# Altium PCB Shield.PcbDoc (part 1 of 3)
Units mm, origin at the board's own origin, x right, y up, seen from the top; angles counter-clockwise.
Board outline 69.82 x 93.25 mm, 4 copper layers (Top Layer, Int1 (GND), Int2 (PWR), Bottom Layer), stack 1.586 mm thick; 51 components, 80 nets, 458 pads, 669 vias.
Unrouted connection lines stored in the file: 105.
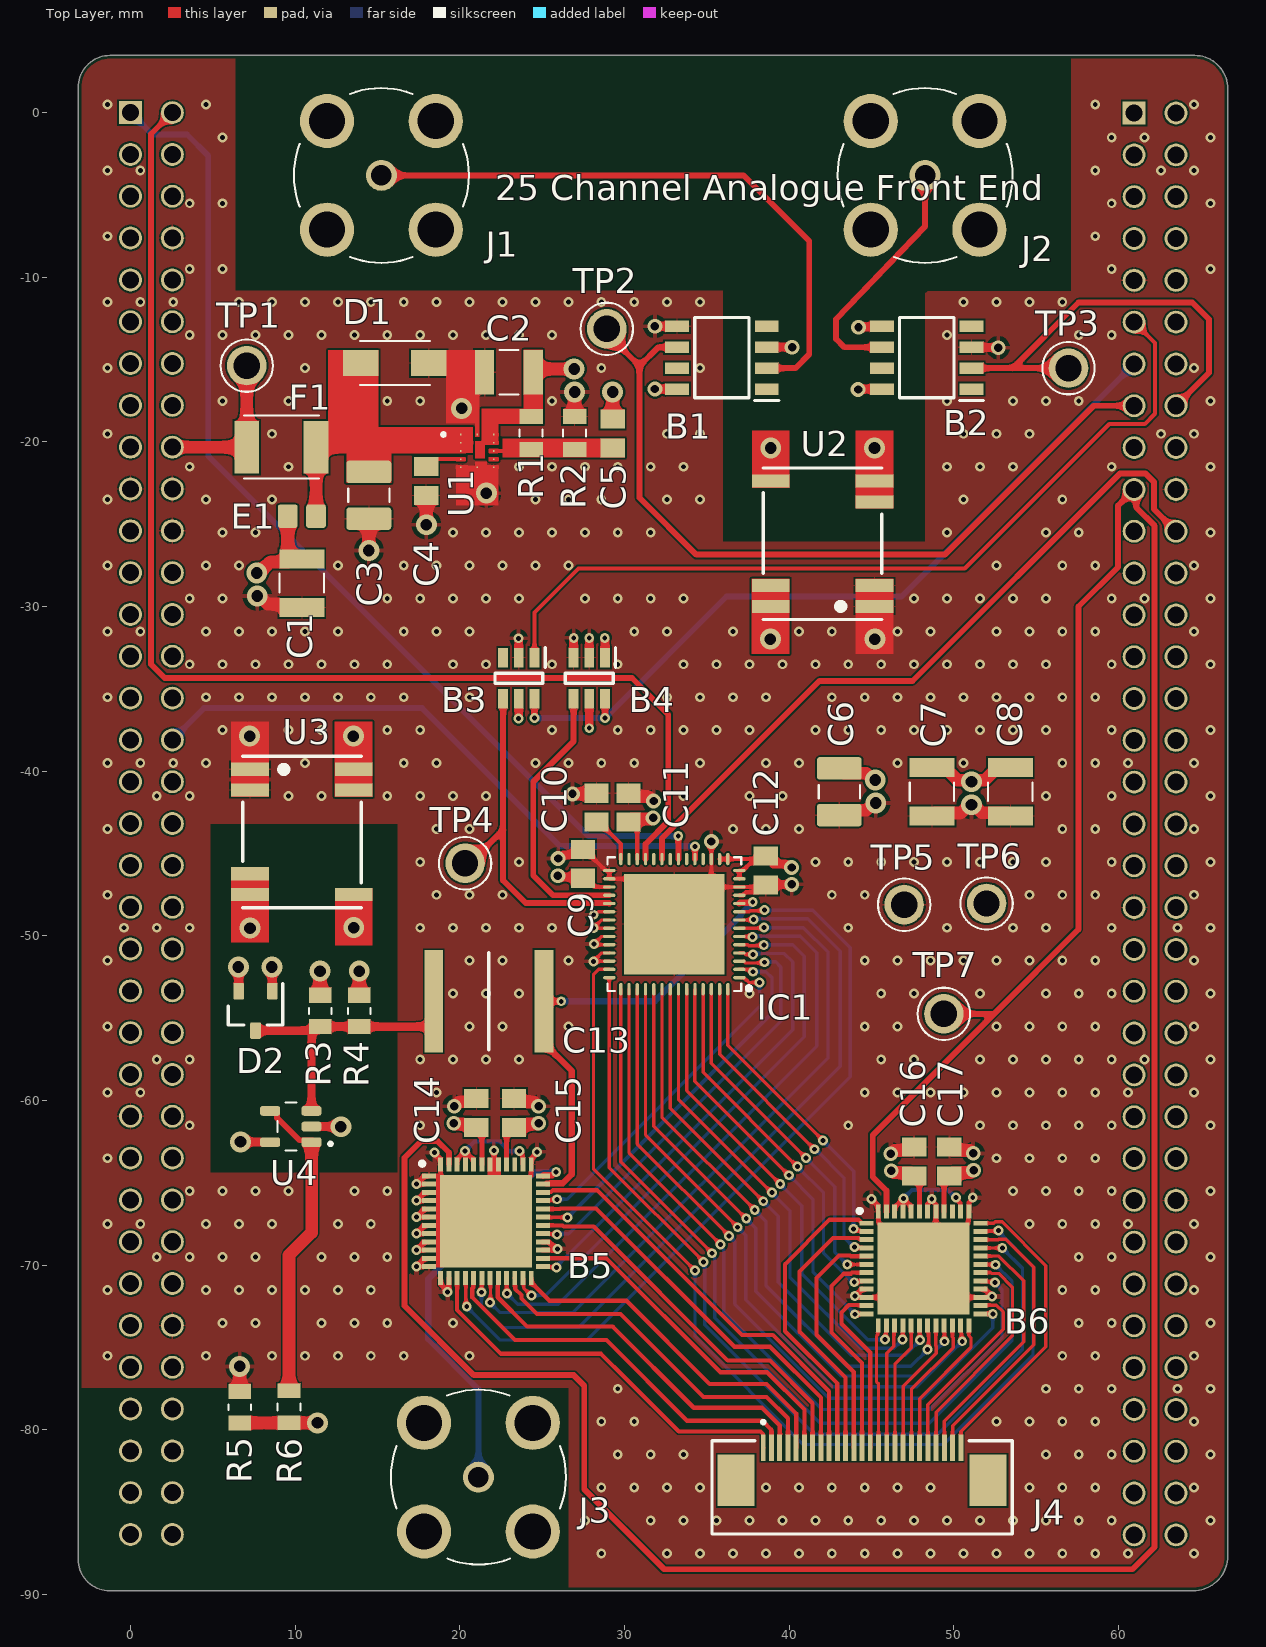
[diagram p0: Top Layer view]
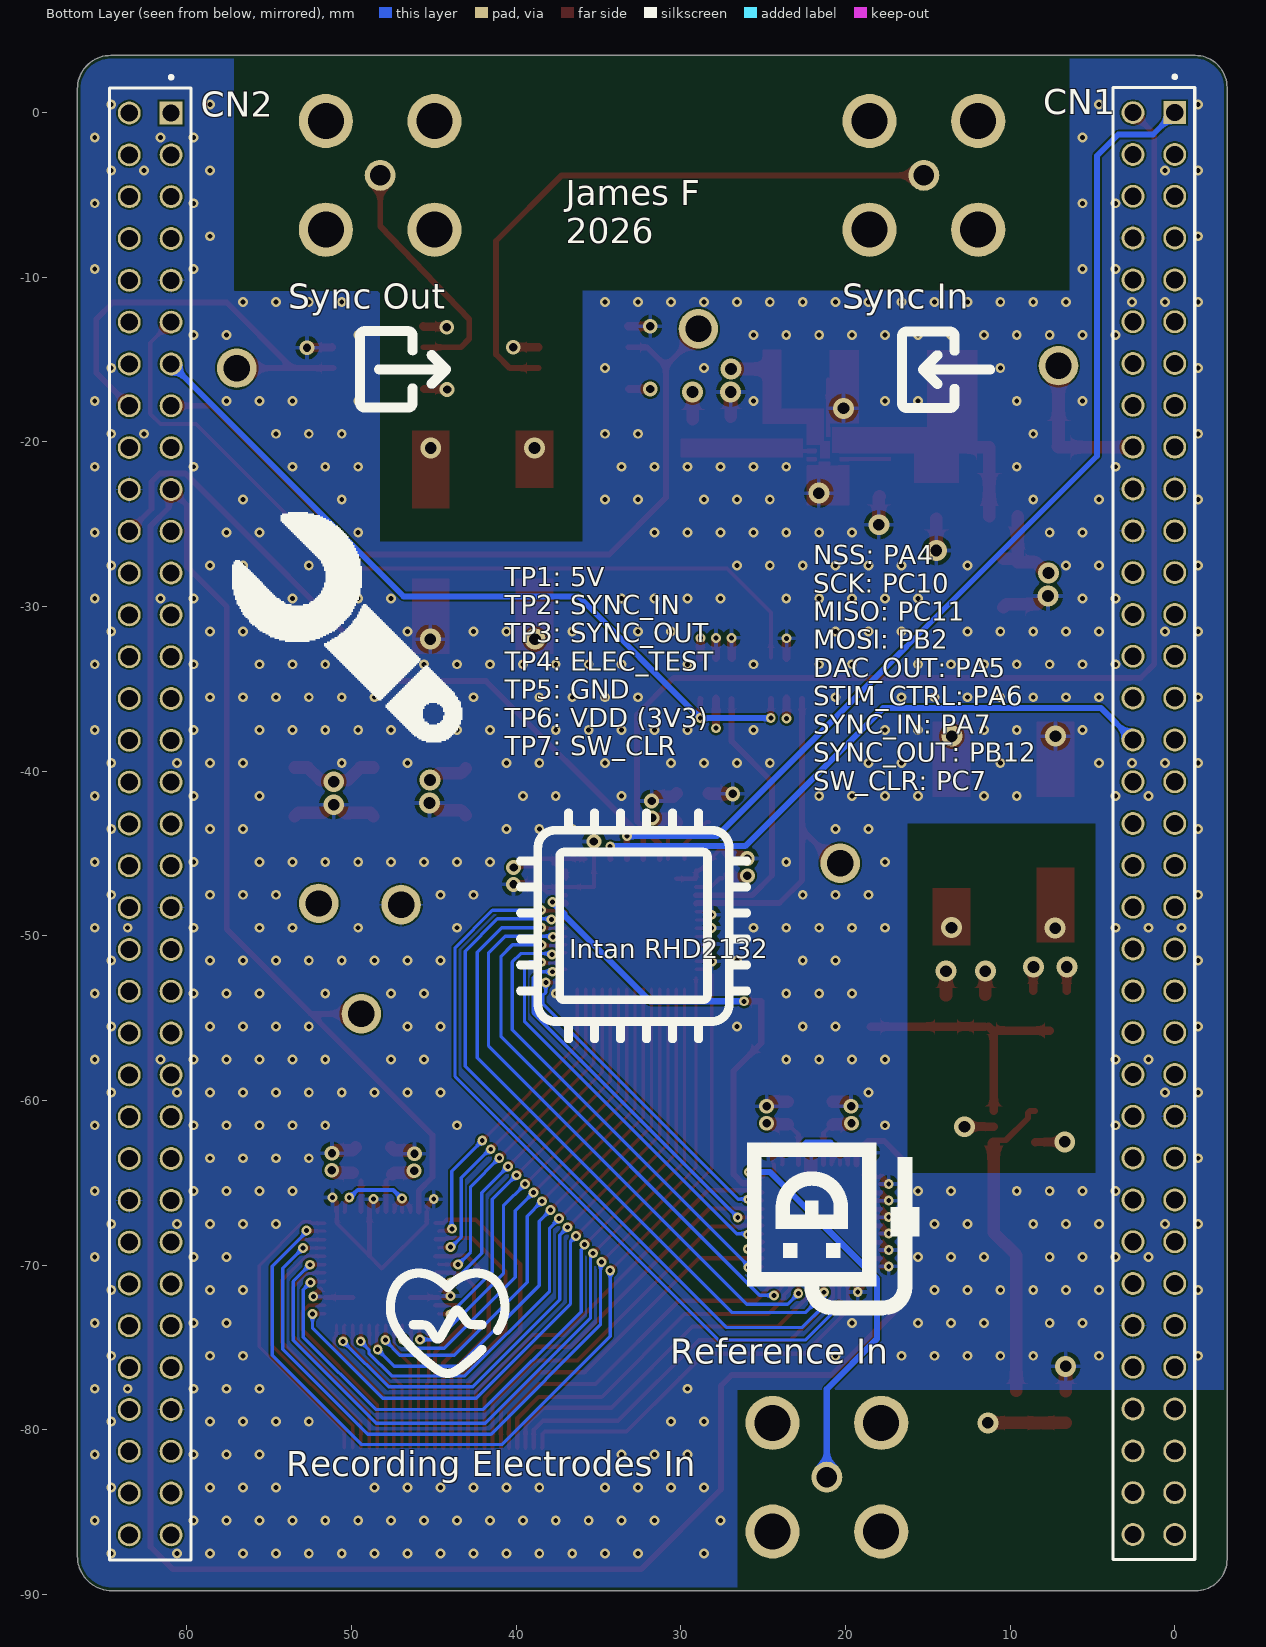
[diagram p1: Bottom Layer view, seen from below]
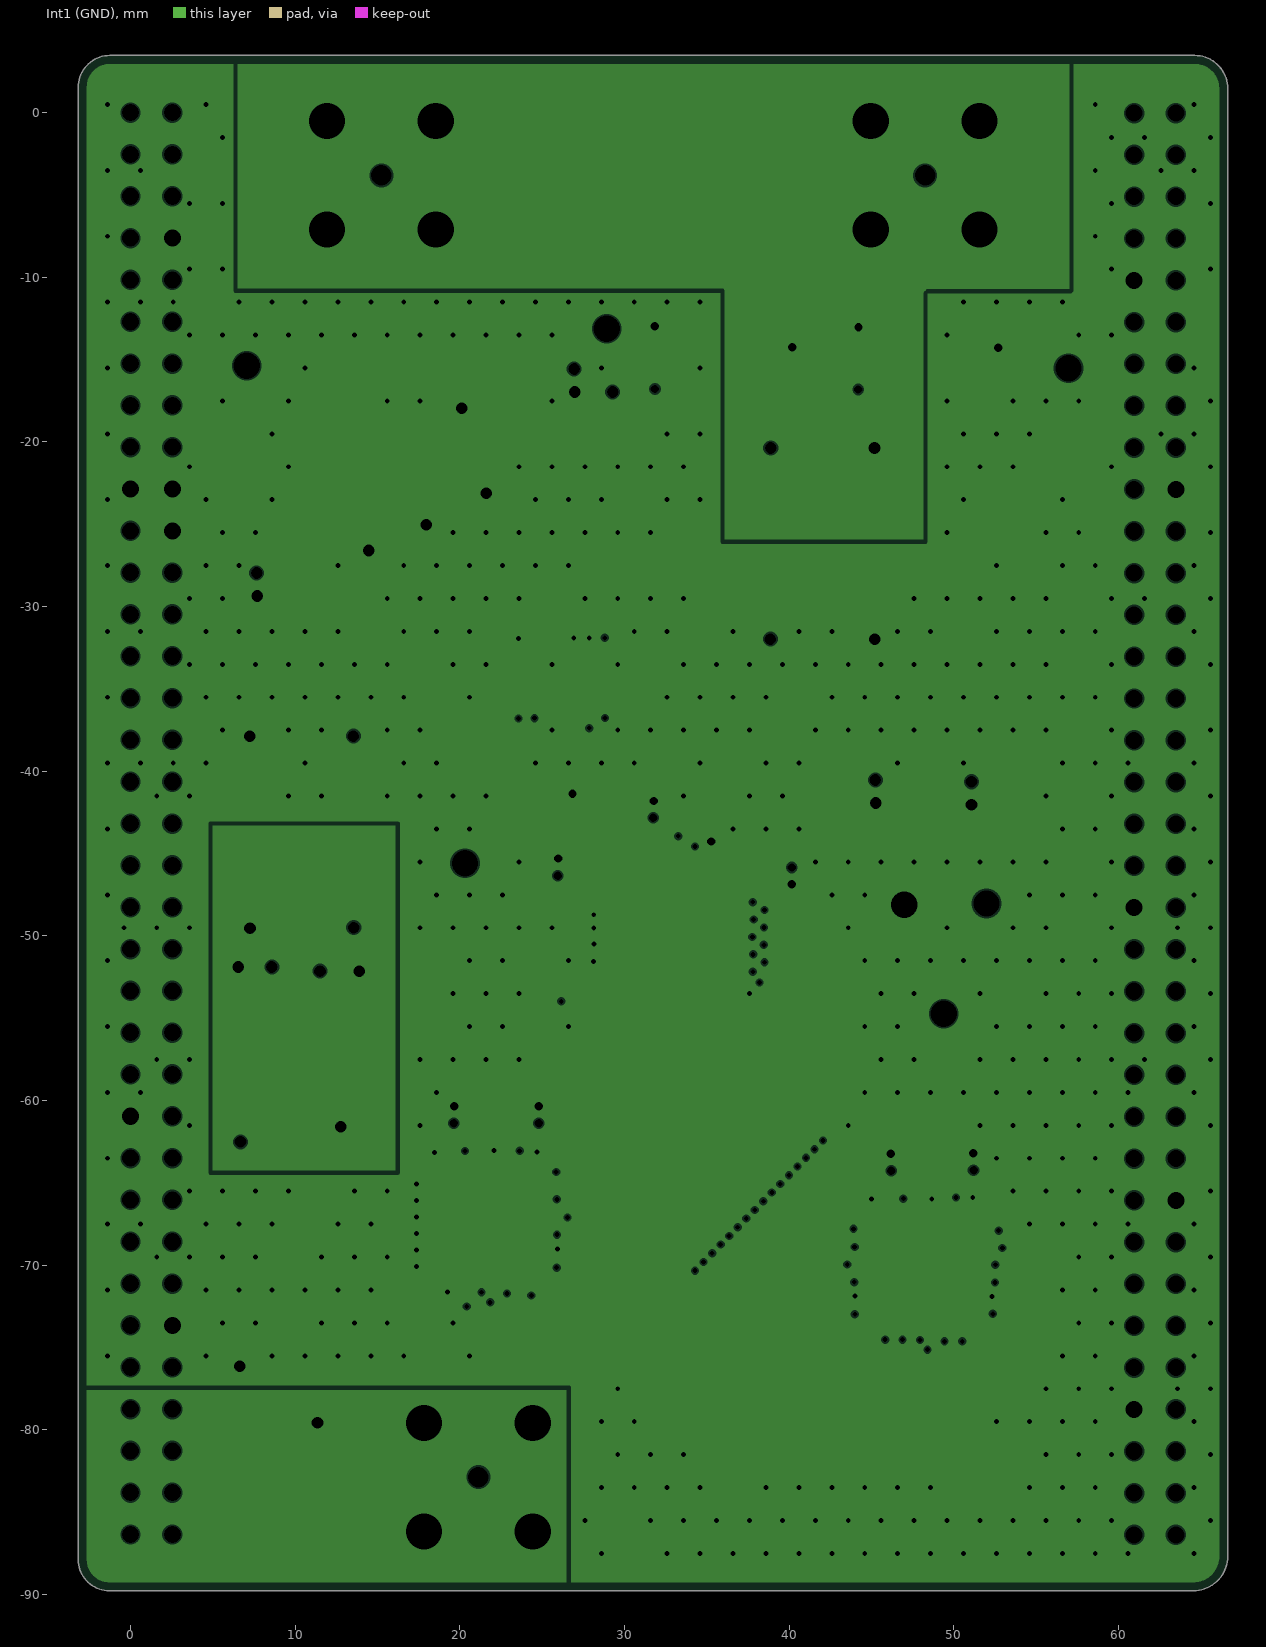
[diagram p2: Int1 (GND), clearances drawn from the general rule]
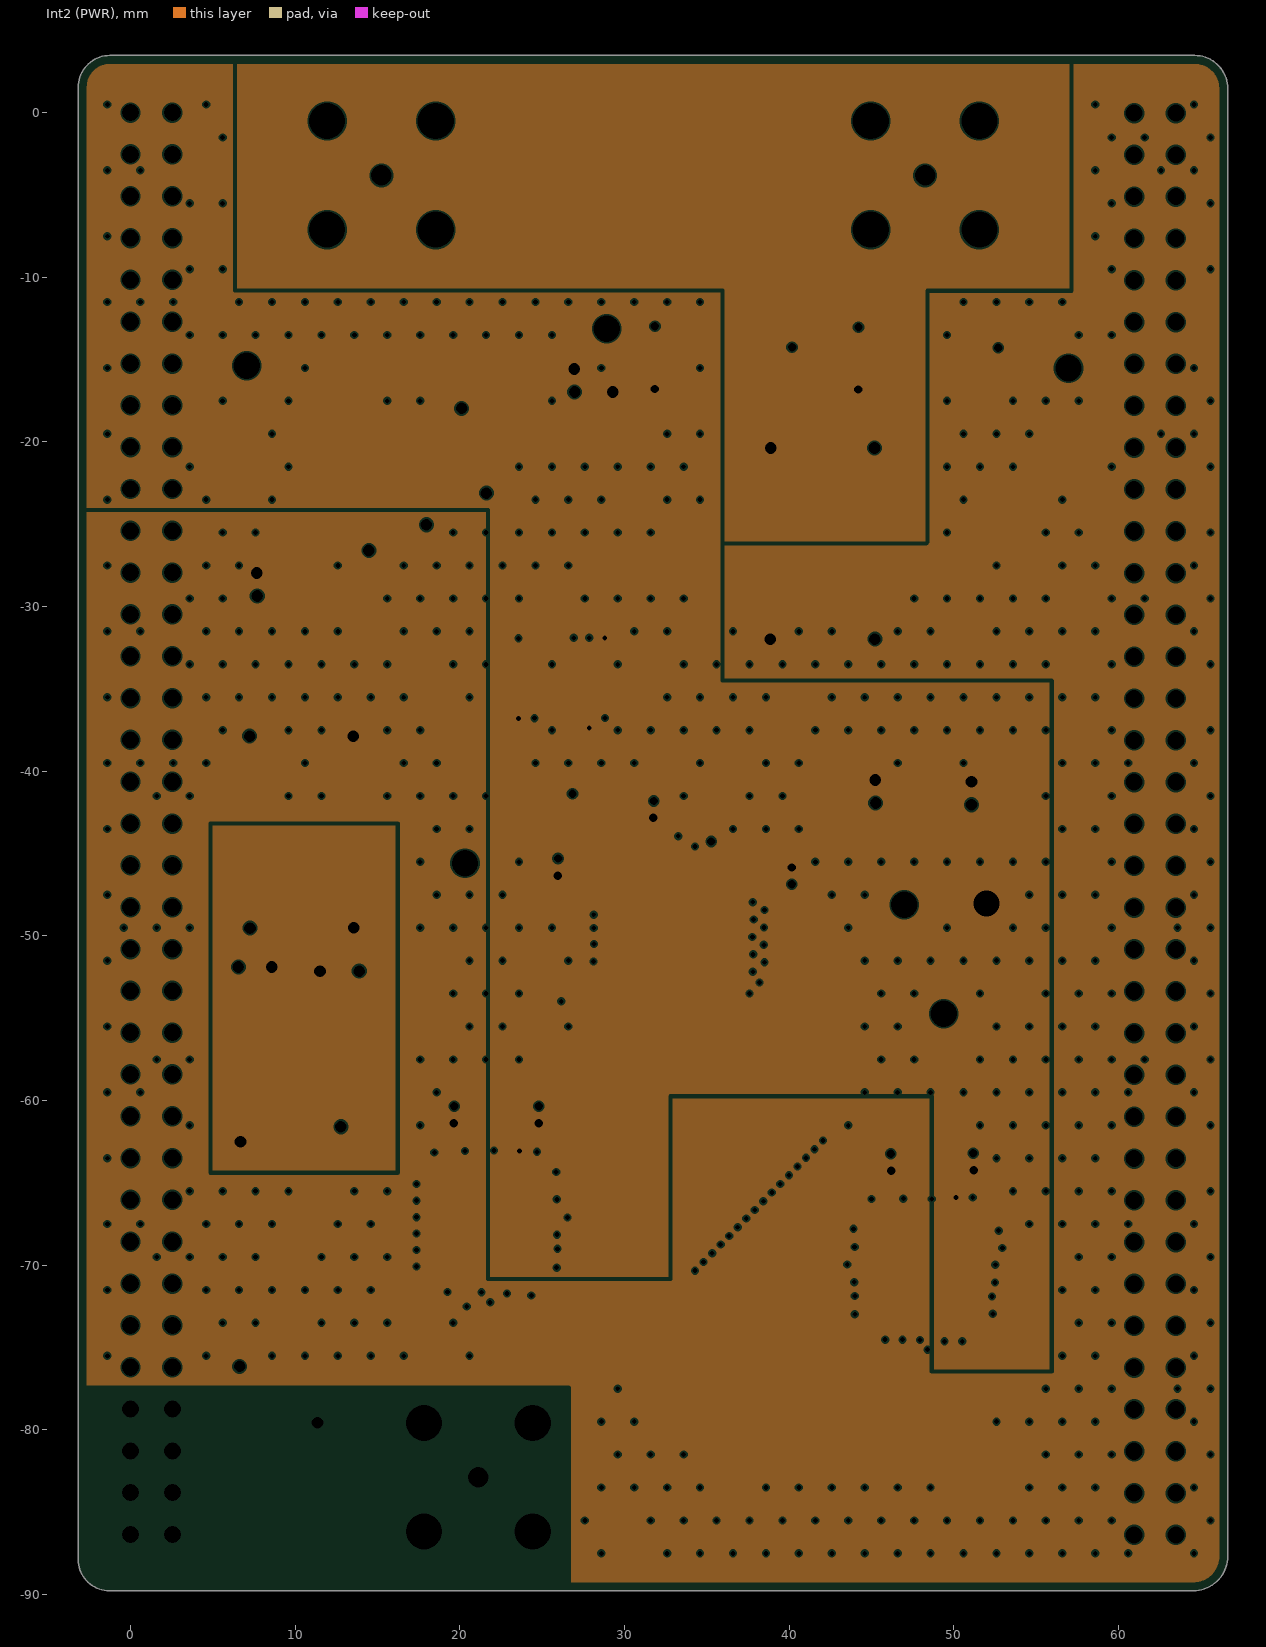
[diagram p3: Int2 (PWR), clearances drawn from the general rule]
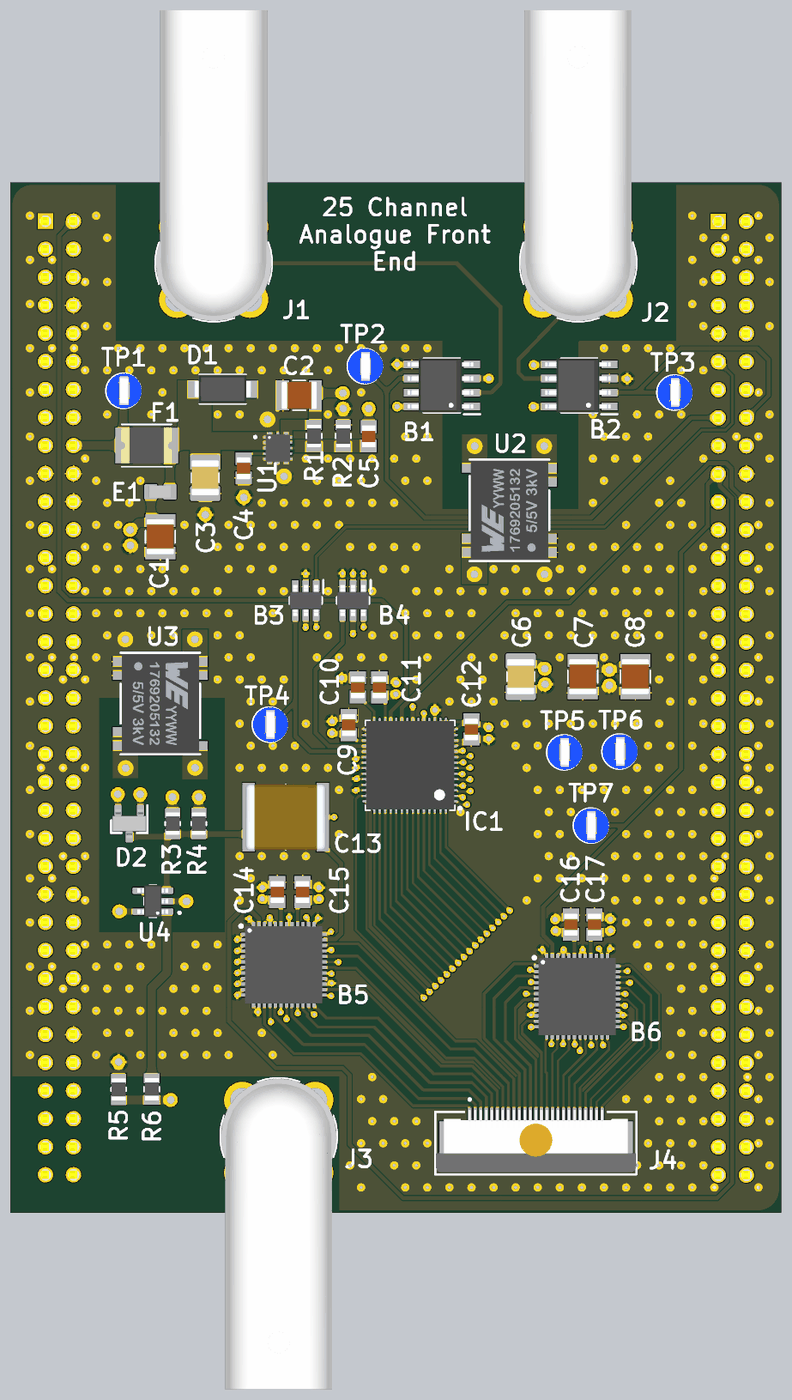
[diagram p5: 3D render of the assembled board from above, using the file's embedded part models]

## Layer stack, top to bottom
Top Solder: solder mask 0.0152, SM-001, Dk 3.8
Top Layer: signal copper 0.035
Dielectric 1: prepreg 0.2104, PP-022, Dk 4.4
Int1 (GND): plane copper 0.0152, net (Multiple Nets)
Dielectric 3: core 1.065, Core, Dk 4.6
Int2 (PWR): plane copper 0.0152, net (Multiple Nets)
Dielectric 5: prepreg 0.2104, PP-022, Dk 4.4
Bottom Layer: signal copper 0.035
Bottom Solder: solder mask 0.0152, SM-001, Dk 3.8

## Board outline
-3.175,-87.875 ccw(c-1.275,-87.875) -1.275,-89.775 64.55,-89.775 ccw(c64.55,-87.675) 66.65,-87.675 66.65,1.45 ccw(c64.625,1.45) 64.625,3.475 -1.25,3.475 ccw(c-1.238,1.537) -3.175,1.525

## Design rules (kind name [scope] priority, off if disabled: settings)
BoardOutlineClearance [All] p1: gap=0.2 ignorepadtopadclearanceinfootprint=FALSE
Clearance [All] p1: gap=0.102 ignorepadtopadclearanceinfootprint=FALSE except(0.127: Arc-Via Track-Via SMDPad-Via THPad-Via Via-Via Via-Fill Via-Poly Via-Region Via-Text; 0.25: Arc-Hole Track-Hole SMDPad-Hole THPad-Hole Via-Hole Fill-Hole Poly-Hole Region-Hole Text-Hole)
ComponentClearance [All] p1: gap=0.102 collisioncheckmode=3 verticalgap=0.102 showdistances=TRUE
DiffPairsRouting [All] p1: maxlimit=0.102 minlimit=0.102 mostfreqgap=0.102 toplayer_minwidth=0.102 toplayer_maxwidth=1816.048 toplayer_prefwidth=0.102 bottomlayer_minwidth=0.102 bottomlayer_maxwidth=1816.048 bottomlayer_prefwidth=0.102 maxuncoupledlength=12.7
Height [All] p1: minheight=0 maxheight=1816.048 prefheight=12.7
HoleSize [All] p1: absolutevalues=TRUE maxlimit=6.3 minlimit=0.3 maxpercent=80.000 minpercent=20.000
HoleToHoleClearance [All] p1: gap=0.25 allowstackedmicrovias=FALSE
MinimumAnnularRing [All] p1: minimumring=0.15
MinimumSolderMaskSliver [All] p1: minsoldermaskwidth=0
PlaneClearance [All] p1: clearance=0.102
PlaneConnect PlaneConnectPowerPads [InPadClass('PowerPads')] p1: planeconnectstyle=Direct reliefexpansion=0.508 reliefentries=4 reliefconductorwidth=0.254 reliefairgap=0.254
PlaneConnect [All] p2: pad.planeconnectstyle=Relief pad.reliefexpansion=0.3 pad.reliefentries=4 pad.reliefconductorwidth=0.102 pad.reliefairgap=0.102 via.planeconnectstyle=Direct via.reliefexpansion=0.3 via.reliefentries=4 via.reliefconductorwidth=0.127 via.reliefairgap=0.127
PolygonConnect PolygonConnectPowerPads [All vs (InPadClass('PowerPads'))] p1: connectstyle=Direct reliefconductorwidth=0.254 reliefentries=4 polygonreliefangle="90 Angle" airgapwidth=0.254
PolygonConnect [All] p2: thpad.connectstyle=Relief thpad.reliefconductorwidth=0.102 thpad.reliefentries=4 thpad.polygonreliefangle="90 Angle" thpad.airgapwidth=0.102 smdpad.connectstyle=Relief smdpad.reliefconductorwidth=0.102 smdpad.reliefentries=4 smdpad.polygonreliefangle="90 Angle" smdpad.airgapwidth=0.102 via.connectstyle=Direct via.reliefconductorwidth=0.127 via.reliefentries=4 via.polygonreliefangle="90 Angle" via.airgapwidth=0.127
RoutingVias [All] p1: holewidth=0.2 width=0.45 viastyle="Through Hole" minholewidth=0.2 minwidth=0.45 maxholewidth=6.3 maxwidth=6.55
SilkToSilkClearance [All] p1: silktosilkclearance=0
SilkToSolderMaskClearance [IsPad] p1: minsilkscreentomaskgap=0.102 clearancetoexposedcopper=TRUE
SolderMaskExpansion [All] p1: expansion=0.075 istentingtop=FALSE
SupplyNets "Schematic Supply Nets" [InNet('GND')] p1: voltage=0.000
Width Power [InNetClass('Power')] p1: maxlimit=1.016 minlimit=0.254 preferedwidth=0.762 minimp=50.000000 maximp=50.000000 favimp=50.000000
Width Digital [InNetClass('Digital')] p2: maxlimit=0.357 minlimit=0.357 preferedwidth=0.357 impedanceprofiledriven=TRUE impedanceprofileid={9357C3F5-1CA4-44C2-8BFA-D5DC4E98D6F2} impedanceprofilevalue=50.000000 minimp=50.000000 maximp=50.000000 favimp=50.000000
Width [All] p3: maxlimit=1816.048 minlimit=0.102 preferedwidth=0.102
20 further rules are at their usual default settings.

## Classes and differential pairs
net class Digital: MISO MOSI NetB1_2 NetB2_6 NSS SCK STIM_CTRL SW_CLR SYNC_IN SYNC_OUT
net class Power: 5V ISO_5V ISO_GND NetC3_1 OPA_5V OPA_GND SW_5V VDD
component class "Power Supply": C3 C4 C5 C6 C7 C8 D1 E1 F1 R1 R2 U1 U2 U3
component class "Input Protection": B5 B6 C1 C2 C13 C14 C15 C16 C17 D2 J3 J4 R3 R4 R5 R6 U4
component class "AFE Shield": B1 B2 CN1 CN2 J1 J2 TP1 TP2 TP3 TP4 TP5 TP6 TP7
component class "AFE Chip": B3 B4 C9 C10 C11 C12 IC1

## Components (designator, comment, footprint, x,y, rotation, side; value= is the part's Value field where it differs from the comment)
B1 "FOD050L" SOIC127P594X363-8N 35.916,-14.884 r180 top
B2 "FOD050L" SOIC127P594X363-8N 48.362,-14.884 r180 top
B3 "TS5A3159ADBVR" SOT95P280X145-6N 23.583,-34.353 r270 top
B4 "TS5A3159ADBVR" SOT95P280X145-6N 27.864,-34.353 r270 top
B5 "MAX14866UTM+" QFN50P700X700X80-49N 21.59,-67.335 r0 top
B6 "MAX14866UTM+" QFN50P700X700X80-49N 48.166,-70.206 r0 top
C1 "C1210C106K5PACTU" CAPC3225X280N 10.409,-28.577 r270 top value=10µF
C2 "C1210C106K5PACTU" CAPC3225X280N 22.987,-15.773 r180 top value=10µF
C3 "CL32B476KPJNNWE" CAPC3225X270N 14.478,-23.241 r270 top value=47µF
C4 "C0805C104K6RACTU" CAPC2012X88N#1 17.958,-22.377 r270 top value=100nF
C5 "C0805C103J5RACTU" CAPC2012X88N#2 29.286,-19.488 r90 top value=10nF
C6 "CL32B476KPJNNWE" CAPC3225X270N 43.053,-41.25 r270 top value=47µF
C7 "C1210C106K5PACTU" CAPC3225X280N 48.679,-41.25 r270 top value=10µF
C8 "C1210C106K5PACTU" CAPC3225X280N 53.442,-41.25 r270 top value=10µF
C9 "C0805C104K6RACTU" CAPC2012X88N#1 27.481,-45.629 r270 top value=100nF
C10 "C0805C103J5RACTU" CAPC2012X88N#2 28.296,-42.215 r270 top value=10nF
C11 "C0805C104K6RACTU" CAPC2012X88N#1 30.251,-42.215 r270 top value=100nF
C12 "C0805C104K6RACTU" CAPC2012X88N#1 38.583,-46.025 r90 top value=100nF
C13 "CB057D0105JBC" CAPC7361X470N 21.768,-53.975 r0 top value=1µF
C14 "C0805C104K6RACTU" CAPC2012X88N#1 21.006,-60.757 r270 top value=100nF
C15 "C0805C104K6RACTU" CAPC2012X88N#1 23.292,-60.757 r270 top value=100nF
C16 "C0805C104K6RACTU" CAPC2012X88N#1 47.6,-63.703 r270 top value=100nF
C17 "C0805C104K6RACTU" CAPC2012X88N#1 49.733,-63.703 r270 top value=100nF
CN1 "SSW-135-02-G-D" SAMTEC_SSW-135-02-G-D 0,0 r90 bottom
CN2 "SSW-135-02-G-D" SAMTEC_SSW-135-02-G-D 60.96,-0.025 r90 bottom
D1 "SMAJ5.0CA" DIOM5126X229N 16.053,-15.215 r0 top
D2 "BAT54S" SOT-23 7.595,-54.559 r270 top
E1 "2-2176744-2" BEADC2012X110N 10.409,-24.511 r180 top
F1 "MF-MSMF050" FUSER_MF-MSMF050 9.169,-20.32 r0 top
IC1 "RHD2132" RHD2216 33.032,-49.287 r180 top
J1 "2466267-1" TE_2466267-1 15.24,-3.81 r180 top
J2 "2466267-1" TE_2466267-1 48.26,-3.81 r180 top
J3 "2466267-1" TE_2466267-1 21.131,-82.88 r0 top
J4 "ZF5S-25-01-T-WT-K-TR" SAMTEC_ZF5S-25-01-T-WT-K-TR 44.432,-83.075 r0 top
R1 "CRCW080511K8FKEC" RESC2012X50N 24.333,-19.456 r270 top value=11.8k
R2 "CRCW08053K74FKEA" RESC2012X50N 26.975,-19.456 r90 top value=3.74k
R3 "RC0805FR-0710ML" RESC2012X60N 11.532,-54.559 r270 top value=10M
R4 "RC0805FR-0710ML" RESC2012X60N 13.894,-54.559 r90 top value=10M
R5 "RC0805FR-0710ML" RESC2012X60N 6.629,-78.625 r90 top value=10M
R6 "MCU08050C1000FP500" RESC2012X55N 9.627,-78.61 r90 top value=100
TP1 "5277" KEYSTONE_5277 7.061,-15.367 r90 top
TP2 "5277" KEYSTONE_5277 28.931,-13.132 r90 top
TP3 "5277" KEYSTONE_5277 56.972,-15.519 r90 top
TP4 "5277" KEYSTONE_5277 20.32,-45.593 r90 top
TP5 "5277" KEYSTONE_5277 46.99,-48.108 r90 top
TP6 "5277" KEYSTONE_5277 51.994,-48.031 r90 top
TP7 "5277" KEYSTONE_5277 49.403,-54.737 r90 top
U1 "TPS7A5201RPSR" IC_TPS7A5201RPSR 21.057,-20.549 r0 top
U2 "WRME-FIMM_1769205132" WRME-FIMM_1769205132 42.037,-26.187 r90 top
U3 "WRME-FIMM_1769205132" WRME-FIMM_1769205132 10.409,-43.688 r270 top
U4 "OPA365AQDBVRQ1" SOT95P280X145-5N 9.736,-61.582 r180 top

## Footprints (in the part's own frame and the unit in brackets; to place one, negate y for a bottom-side part, rotate by r counter-clockwise, add the part's x,y. Pads: shape width x height; smd on the part's side, far side on the other; paste and mask are expansions set on the pad)
BEADC2012X110N [mm]
  rrect25% 1.2x1.42 smd paste+0 mask+0.102: 1(-0.86,0) 2(0.86,0)
  body extent -0.97,-0.59 1.03,0.61, height 0.91
CAPC2012X88N#1 [mm]
  rect 1.16x1.47 smd paste+0 mask+0.102: 1(-0.875,0) 2(0.875,0)
  body extent -1,-0.63 1,0.63, height 0.88
CAPC2012X88N#2 [mm]
  rect 1.16x1.47 smd: 1(-0.875,0) 2(0.875,0)
  body extent -1,-0.63 1,0.63, height 0.88
CAPC3225X270N [mm]
  rrect25% 1.37x2.72 smd paste+0 mask+0.102: 1(-1.421,0) 2(1.421,0)
  silkscreen extent -0.42,-1.25 0.42,1.25, body extent -1.6,-1.25 1.6,1.25, height 2.7
CAPC3225X280N [mm]
  rect 1.16x2.72 smd paste+0 mask+0.102: 1(-1.475,0) 2(1.475,0)
  silkscreen extent -0.57,-1.35 0.57,1.35, body extent -1.6,-1.25 1.6,1.25, height 2.8
CAPC7361X470N [mm]
  rect 1.14x6.24 smd: 1(-3.35,0) 2(3.35,0)
  silkscreen extent 0,-2.95 0,2.95, body extent -3.65,-3.05 3.65,3.05, height 4.7
DIOM5126X229N [mm]
  rect 2.17x1.57 smd: 1(-2.065,0) 2(2.065,0)
  silkscreen extent -2.12,-1.33 2.12,1.33, body extent -2.61,-1.3 2.61,1.3, height 2.4
FUSER_MF-MSMF050 [mm]
  rect 1.5x3.2 smd: 1(-2.1,0) 2(2.1,0)
  silkscreen extent -2.27,-1.91 2.27,1.91, body extent -2.27,-1.62 2.27,1.62, height 0.85
IC_TPS7A5201RPSR [mm]
  rect 0.1x0.1 smd paste-1 mask+0: 1(-1,1) 2(-1,0.5) 3(-1,0) 4(-1,-0.5) 5(-1,-1) 6(0,-1) 7(1,-1) 8(1,-0.5) 9(1,0) 10(1,0.5) 11(1,1) 12(0,1)
  Top Layer region: 0.083,1.449 0.085,1.449 0.088,1.448 0.09,1.448 0.093,1.447 0.095,1.446 0.098,1.445 0.1,1.443 0.102,1.442 0.104,1.44 0.106,1.439 0.108,1.437 0.11,1.435 0.112,1.433 0.114,1.431 0.115,1.429 0.117,1.427 0.118,1.425 0.12,1.423 0.121,1.42 0.122,1.418 0.123,1.415 0.123,1.413 0.124,1.41 0.124,1.408 0.125,1.405 0.125,1.403 0.125,1.4 0.125,0.9 0.125,0.897 0.125,0.895 0.124,0.892 0.124,0.89 0.123,0.887 0.123,0.885 0.122,0.882 0.121,0.88 0.12,0.877 0.118,0.875 0.117,0.873 0.115,0.871 0.114,0.869 0.112,0.867 0.11,0.865 0.108,0.863 0.106,0.861 0.104,0.86 0.102,0.858 0.1,0.857 0.098,0.855 0.095,0.854 0.093,0.853 0.09,0.852 0.088,0.852 0.085,0.851 0.083,0.851 0.08,0.85 -0.08,0.85 -0.083,0.851 -0.085,0.851 -0.088,0.852 -0.09,0.852 -0.093,0.853 -0.095,0.854 -0.098,0.855 -0.1,0.857 -0.102,0.858 -0.104,0.86 -0.106,0.861 -0.108,0.863 -0.11,0.865 -0.112,0.867 -0.114,0.869 -0.115,0.871 -0.117,0.873 -0.118,0.875 -0.12,0.877 -0.121,0.88 -0.122,0.882 -0.123,0.885 -0.123,0.887 -0.124,0.89 -0.124,0.892 -0.125,0.895 -0.125,0.897 -0.125,0.9 -0.125,1.4 -0.125,1.403 -0.125,1.405 -0.124,1.408 -0.124,1.41 -0.123,1.413 -0.123,1.415 -0.122,1.418 -0.121,1.42 -0.12,1.423 -0.118,1.425 -0.117,1.427 -0.115,1.429 -0.114,1.431 -0.112,1.433 -0.11,1.435 -0.108,1.437 -0.106,1.439 -0.104,1.44 -0.102,1.442 -0.1,1.443 -0.098,1.445 -0.095,1.446 -0.093,1.447 -0.09,1.448 -0.088,1.448 -0.085,1.449 -0.083,1.449 -0.08,1.45 0.08,1.45
  Top Layer region: 1.258,-0.876 1.26,-0.876 1.263,-0.877 1.265,-0.877 1.268,-0.878 1.27,-0.879 1.273,-0.88 1.275,-0.882 1.277,-0.883 1.279,-0.885 1.281,-0.886 1.283,-0.888 1.285,-0.89 1.287,-0.892 1.289,-0.894 1.29,-0.896 1.292,-0.898 1.293,-0.9 1.295,-0.902 1.296,-0.905 1.297,-0.907 1.298,-0.91 1.298,-0.912 1.299,-0.915 1.299,-0.917 1.3,-0.92 1.3,-0.922 1.3,-0.925 1.3,-1.05 1.3,-1.053 1.3,-1.055 1.299,-1.058 1.299,-1.06 1.298,-1.063 1.298,-1.065 1.297,-1.068 1.296,-1.07 1.295,-1.073 1.293,-1.075 1.292,-1.077 1.29,-1.079 1.289,-1.081 1.287,-1.083 1.285,-1.085 1.283,-1.087 1.281,-1.089 1.279,-1.09 1.277,-1.092 1.275,-1.093 1.273,-1.095 1.27,-1.096 1.268,-1.097 1.265,-1.098 1.263,-1.098 1.26,-1.099 1.258,-1.099 1.255,-1.1 0.95,-1.1 0.95,-1.4 0.95,-1.403 0.95,-1.405 0.949,-1.408 0.949,-1.41 0.948,-1.413 0.948,-1.415 0.947,-1.418 0.946,-1.42 0.945,-1.423 0.943,-1.425 0.942,-1.427 0.94,-1.429 0.939,-1.431 0.937,-1.433 0.935,-1.435 0.933,-1.437 0.931,-1.439 0.929,-1.44 0.927,-1.442 0.925,-1.443 0.923,-1.445 0.92,-1.446 0.918,-1.447 0.915,-1.448 0.913,-1.448 0.91,-1.449 0.908,-1.449 0.905,-1.45 0.595,-1.45 0.592,-1.449 0.59,-1.449 0.587,-1.448 0.585,-1.448 0.582,-1.447 0.58,-1.446 0.577,-1.445 0.575,-1.443 0.573,-1.442 0.571,-1.44 0.569,-1.439 0.567,-1.437 0.565,-1.435 0.563,-1.433 0.561,-1.431 0.56,-1.429 0.558,-1.427 0.557,-1.425 0.555,-1.423 0.554,-1.42 0.553,-1.418 0.552,-1.415 0.552,-1.413 0.551,-1.41 0.551,-1.408 0.55,-1.405 0.55,-1.403 0.55,-1.4 0.55,-0.925 0.55,-0.922 0.55,-0.92 0.551,-0.917 0.551,-0.915 0.552,-0.912 0.552,-0.91 0.553,-0.907 0.554,-0.905 0.555,-0.902 0.557,-0.9 0.558,-0.898 0.56,-0.896 0.561,-0.894 0.563,-0.892 0.565,-0.89 0.567,-0.888 0.569,-0.886 0.571,-0.885 0.573,-0.883 0.575,-0.882 0.577,-0.88 0.58,-0.879 0.582,-0.878 0.585,-0.877 0.587,-0.877 0.59,-0.876 0.592,-0.876 0.595,-0.875 1.255,-0.875
  Top Layer region: 0.083,-0.651 0.085,-0.651 0.088,-0.652 0.09,-0.652 0.093,-0.653 0.095,-0.654 0.098,-0.655 0.1,-0.657 0.102,-0.658 0.104,-0.66 0.106,-0.661 0.108,-0.663 0.11,-0.665 0.112,-0.667 0.114,-0.669 0.115,-0.671 0.117,-0.673 0.118,-0.675 0.12,-0.677 0.121,-0.68 0.122,-0.682 0.123,-0.685 0.123,-0.687 0.124,-0.69 0.124,-0.692 0.125,-0.695 0.125,-0.697 0.125,-0.7 0.125,-1.4 0.125,-1.403 0.125,-1.405 0.124,-1.408 0.124,-1.41 0.123,-1.413 0.123,-1.415 0.122,-1.418 0.121,-1.42 0.12,-1.423 0.118,-1.425 0.117,-1.427 0.115,-1.429 0.114,-1.431 0.112,-1.433 0.11,-1.435 0.108,-1.437 0.106,-1.439 0.104,-1.44 0.102,-1.442 0.1,-1.443 0.098,-1.445 0.095,-1.446 0.093,-1.447 0.09,-1.448 0.088,-1.448 0.085,-1.449 0.083,-1.449 0.08,-1.45 -0.08,-1.45 -0.083,-1.449 -0.085,-1.449 -0.088,-1.448 -0.09,-1.448 -0.093,-1.447 -0.095,-1.446 -0.098,-1.445 -0.1,-1.443 -0.102,-1.442 -0.104,-1.44 -0.106,-1.439 -0.108,-1.437 -0.11,-1.435 -0.112,-1.433 -0.114,-1.431 -0.115,-1.429 -0.117,-1.427 -0.118,-1.425 -0.12,-1.423 -0.121,-1.42 -0.122,-1.418 -0.123,-1.415 -0.123,-1.413 -0.124,-1.41 -0.124,-1.408 -0.125,-1.405 -0.125,-1.403 -0.125,-1.4 -0.125,-0.7 -0.125,-0.697 -0.125,-0.695 -0.124,-0.692 -0.124,-0.69 -0.123,-0.687 -0.123,-0.685 -0.122,-0.682 -0.121,-0.68 -0.12,-0.677 -0.118,-0.675 -0.117,-0.673 -0.115,-0.671 -0.114,-0.669 -0.112,-0.667 -0.11,-0.665 -0.108,-0.663 -0.106,-0.661 -0.104,-0.66 -0.102,-0.658 -0.1,-0.657 -0.098,-0.655 -0.095,-0.654 -0.093,-0.653 -0.09,-0.652 -0.088,-0.652 -0.085,-0.651 -0.083,-0.651 -0.08,-0.65 0.08,-0.65
  Top Layer region: -0.592,-0.876 -0.59,-0.876 -0.587,-0.877 -0.585,-0.877 -0.582,-0.878 -0.58,-0.879 -0.577,-0.88 -0.575,-0.882 -0.573,-0.883 -0.571,-0.885 -0.569,-0.886 -0.567,-0.888 -0.565,-0.89 -0.563,-0.892 -0.561,-0.894 -0.56,-0.896 -0.558,-0.898 -0.557,-0.9 -0.555,-0.902 -0.554,-0.905 -0.553,-0.907 -0.552,-0.91 -0.552,-0.912 -0.551,-0.915 -0.551,-0.917 -0.55,-0.92 -0.55,-0.922 -0.55,-0.925 -0.55,-1.4 -0.55,-1.403 -0.55,-1.405 -0.551,-1.408 -0.551,-1.41 -0.552,-1.413 -0.552,-1.415 -0.553,-1.418 -0.554,-1.42 -0.555,-1.423 -0.557,-1.425 -0.558,-1.427 -0.56,-1.429 -0.561,-1.431 -0.563,-1.433 -0.565,-1.435 -0.567,-1.437 -0.569,-1.439 -0.571,-1.44 -0.573,-1.442 -0.575,-1.443 -0.577,-1.445 -0.58,-1.446 -0.582,-1.447 -0.585,-1.448 -0.587,-1.448 -0.59,-1.449 -0.592,-1.449 -0.595,-1.45 -0.905,-1.45 -0.908,-1.449 -0.91,-1.449 -0.913,-1.448 -0.915,-1.448 -0.918,-1.447 -0.92,-1.446 -0.923,-1.445 -0.925,-1.443 -0.927,-1.442 -0.929,-1.44 -0.931,-1.439 -0.933,-1.437 -0.935,-1.435 -0.937,-1.433 -0.939,-1.431 -0.94,-1.429 -0.942,-1.427 -0.943,-1.425 -0.945,-1.423 -0.946,-1.42 -0.947,-1.418 -0.948,-1.415 -0.948,-1.413 -0.949,-1.41 -0.949,-1.408 -0.95,-1.405 -0.95,-1.403 -0.95,-1.4 -0.95,-1.1 -1.255,-1.1 -1.258,-1.099 -1.26,-1.099 -1.263,-1.098 -1.265,-1.098 -1.268,-1.097 -1.27,-1.096 -1.273,-1.095 -1.275,-1.093 -1.277,-1.092 -1.279,-1.09 -1.281,-1.089 -1.283,-1.087 -1.285,-1.085 -1.287,-1.083 -1.289,-1.081 -1.29,-1.079 -1.292,-1.077 -1.293,-1.075 -1.295,-1.073 -1.296,-1.07 -1.297,-1.068 -1.298,-1.065 -1.298,-1.063 -1.299,-1.06 -1.299,-1.058 -1.3,-1.055 -1.3,-1.053 -1.3,-1.05 -1.3,-0.925 -1.3,-0.922 -1.3,-0.92 -1.299,-0.917 -1.299,-0.915 -1.298,-0.912 -1.298,-0.91 -1.297,-0.907 -1.296,-0.905 -1.295,-0.902 -1.293,-0.9 -1.292,-0.898 -1.29,-0.896 -1.289,-0.894 -1.287,-0.892 -1.285,-0.89 -1.283,-0.888 -1.281,-0.886 -1.279,-0.885 -1.277,-0.883 -1.275,-0.882 -1.273,-0.88 -1.27,-0.879 -1.268,-0.878 -1.265,-0.877 -1.263,-0.877 -1.26,-0.876 -1.258,-0.876 -1.255,-0.875 -0.595,-0.875
  Top Layer region: 0.908,1.449 0.91,1.449 0.913,1.448 0.915,1.448 0.918,1.447 0.92,1.446 0.923,1.445 0.925,1.443 0.927,1.442 0.929,1.44 0.931,1.439 0.933,1.437 0.935,1.435 0.937,1.433 0.939,1.431 0.94,1.429 0.942,1.427 0.943,1.425 0.945,1.423 0.946,1.42 0.947,1.418 0.948,1.415 0.948,1.413 0.949,1.41 0.949,1.408 0.95,1.405 0.95,1.403 0.95,1.4 0.95,1.1 1.255,1.1 1.258,1.099 1.26,1.099 1.263,1.098 1.265,1.098 1.268,1.097 1.27,1.096 1.273,1.095 1.275,1.093 1.277,1.092 1.279,1.09 1.281,1.089 1.283,1.087 1.285,1.085 1.287,1.083 1.289,1.081 1.29,1.079 1.292,1.077 1.293,1.075 1.295,1.073 1.296,1.07 1.297,1.068 1.298,1.065 1.298,1.063 1.299,1.06 1.299,1.058 1.3,1.055 1.3,1.053 1.3,1.05 1.3,0.925 1.3,0.922 1.3,0.92 1.299,0.917 1.299,0.915 1.298,0.912 1.298,0.91 1.297,0.907 1.296,0.905 1.295,0.902 1.293,0.9 1.292,0.898 1.29,0.896 1.289,0.894 1.287,0.892 1.285,0.89 1.283,0.888 1.281,0.886 1.279,0.885 1.277,0.883 1.275,0.882 1.273,0.88 1.27,0.879 1.268,0.878 1.265,0.877 1.263,0.877 1.26,0.876 1.258,0.876 1.255,0.875 0.595,0.875 0.592,0.876 0.59,0.876 0.587,0.877 0.585,0.877 0.582,0.878 0.58,0.879 0.577,0.88 0.575,0.882 0.573,0.883 0.571,0.885 0.569,0.886 0.567,0.888 0.565,0.89 0.563,0.892 0.561,0.894 0.56,0.896 0.558,0.898 0.557,0.9 0.555,0.902 0.554,0.905 0.553,0.907 0.552,0.91 0.552,0.912 0.551,0.915 0.551,0.917 0.55,0.92 0.55,0.922 0.55,0.925 0.55,1.4 0.55,1.403 0.55,1.405 0.551,1.408 0.551,1.41 0.552,1.413 0.552,1.415 0.553,1.418 0.554,1.42 0.555,1.423 0.557,1.425 0.558,1.427 0.56,1.429 0.561,1.431 0.563,1.433 0.565,1.435 0.567,1.437 0.569,1.439 0.571,1.44 0.573,1.442 0.575,1.443 0.577,1.445 0.58,1.446 0.582,1.447 0.585,1.448 0.587,1.448 0.59,1.449 0.592,1.449 0.595,1.45 0.905,1.45
  Top Layer region: 1.258,0.624 1.26,0.624 1.263,0.623 1.265,0.623 1.268,0.622 1.27,0.621 1.273,0.62 1.275,0.618 1.277,0.617 1.279,0.615 1.281,0.614 1.283,0.612 1.285,0.61 1.287,0.608 1.289,0.606 1.29,0.604 1.292,0.602 1.293,0.6 1.295,0.598 1.296,0.595 1.297,0.593 1.298,0.59 1.298,0.588 1.299,0.585 1.299,0.583 1.3,0.58 1.3,0.578 1.3,0.575 1.3,0.425 1.3,0.422 1.3,0.42 1.299,0.417 1.299,0.415 1.298,0.412 1.298,0.41 1.297,0.407 1.296,0.405 1.295,0.402 1.293,0.4 1.292,0.398 1.29,0.396 1.289,0.394 1.287,0.392 1.285,0.39 1.283,0.388 1.281,0.386 1.279,0.385 1.277,0.383 1.275,0.382 1.273,0.38 1.27,0.379 1.268,0.378 1.265,0.377 1.263,0.377 1.26,0.376 1.258,0.376 1.255,0.375 0.295,0.375 0.292,0.376 0.29,0.376 0.287,0.377 0.285,0.377 0.282,0.378 0.28,0.379 0.277,0.38 0.275,0.382 0.273,0.383 0.271,0.385 0.269,0.386 0.267,0.388 0.265,0.39 0.263,0.392 0.261,0.394 0.26,0.396 0.258,0.398 0.257,0.4 0.255,0.402 0.254,0.405 0.253,0.407 0.252,0.41 0.252,0.412 0.251,0.415 0.251,0.417 0.25,0.42 0.25,0.422 0.25,0.425 0.25,0.575 0.25,0.578 0.25,0.58 0.251,0.583 0.251,0.585 0.252,0.588 0.252,0.59 0.253,0.593 0.254,0.595 0.255,0.598 0.257,0.6 0.258,0.602 0.26,0.604 0.261,0.606 0.263,0.608 0.265,0.61 0.267,0.612 0.269,0.614 0.271,0.615 0.273,0.617 0.275,0.618 0.277,0.62 0.28,0.621 0.282,0.622 0.285,0.623 0.287,0.623 0.29,0.624 0.292,0.624 0.295,0.625 1.255,0.625
  Top Layer region: 1.258,0.124 1.26,0.124 1.263,0.123 1.265,0.123 1.268,0.122 1.27,0.121 1.273,0.12 1.275,0.118 1.277,0.117 1.279,0.115 1.281,0.114 1.283,0.112 1.285,0.11 1.287,0.108 1.289,0.106 1.29,0.104 1.292,0.102 1.293,0.1 1.295,0.098 1.296,0.095 1.297,0.093 1.298,0.09 1.298,0.088 1.299,0.085 1.299,0.083 1.3,0.08 1.3,0.078 1.3,0.075 1.3,-0.075 1.3,-0.078 1.3,-0.08 1.299,-0.083 1.299,-0.085 1.298,-0.088 1.298,-0.09 1.297,-0.093 1.296,-0.095 1.295,-0.098 1.293,-0.1 1.292,-0.102 1.29,-0.104 1.289,-0.106 1.287,-0.108 1.285,-0.11 1.283,-0.112 1.281,-0.114 1.279,-0.115 1.277,-0.117 1.275,-0.118 1.273,-0.12 1.27,-0.121 1.268,-0.122 1.265,-0.123 1.263,-0.123 1.26,-0.124 1.258,-0.124 1.255,-0.125 0.745,-0.125 0.742,-0.124 0.74,-0.124 0.737,-0.123 0.735,-0.123 0.732,-0.122 0.73,-0.121 0.727,-0.12 0.725,-0.118 0.723,-0.117 0.721,-0.115 0.719,-0.114 0.717,-0.112 0.715,-0.11 0.713,-0.108 0.711,-0.106 0.71,-0.104 0.708,-0.102 0.707,-0.1 0.705,-0.098 0.704,-0.095 0.703,-0.093 0.702,-0.09 0.702,-0.088 0.701,-0.085 0.701,-0.083 0.7,-0.08 0.7,-0.078 0.7,-0.075 0.7,0.075 0.7,0.078 0.7,0.08 0.701,0.083 0.701,0.085 0.702,0.088 0.702,0.09 0.703,0.093 0.704,0.095 0.705,0.098 0.707,0.1 0.708,0.102 0.71,0.104 0.711,0.106 0.713,0.108 0.715,0.11 0.717,0.112 0.719,0.114 0.721,0.115 0.723,0.117 0.725,0.118 0.727,0.12 0.73,0.121 0.732,0.122 0.735,0.123 0.737,0.123 0.74,0.124 0.742,0.124 0.745,0.125 1.255,0.125
  Top Layer region: -0.742,-0.376 -0.74,-0.376 -0.737,-0.377 -0.735,-0.377 -0.732,-0.378 -0.73,-0.379 -0.727,-0.38 -0.725,-0.382 -0.723,-0.383 -0.721,-0.385 -0.719,-0.386 -0.717,-0.388 -0.715,-0.39 -0.713,-0.392 -0.711,-0.394 -0.71,-0.396 -0.708,-0.398 -0.707,-0.4 -0.705,-0.402 -0.704,-0.405 -0.703,-0.407 -0.702,-0.41 -0.702,-0.412 -0.701,-0.415 -0.701,-0.417 -0.7,-0.42 -0.7,-0.422 -0.7,-0.425 -0.7,-0.575 -0.7,-0.578 -0.7,-0.58 -0.701,-0.583 -0.701,-0.585 -0.702,-0.588 -0.702,-0.59 -0.703,-0.593 -0.704,-0.595 -0.705,-0.598 -0.707,-0.6 -0.708,-0.602 -0.71,-0.604 -0.711,-0.606 -0.713,-0.608 -0.715,-0.61 -0.717,-0.612 -0.719,-0.614 -0.721,-0.615 -0.723,-0.617 -0.725,-0.618 -0.727,-0.62 -0.73,-0.621 -0.732,-0.622 -0.735,-0.623 -0.737,-0.623 -0.74,-0.624 -0.742,-0.624 -0.745,-0.625 -1.255,-0.625 -1.258,-0.624 -1.26,-0.624 -1.263,-0.623 -1.265,-0.623 -1.268,-0.622 -1.27,-0.621 -1.273,-0.62 -1.275,-0.618 -1.277,-0.617 -1.279,-0.615 -1.281,-0.614 -1.283,-0.612 -1.285,-0.61 -1.287,-0.608 -1.289,-0.606 -1.29,-0.604 -1.292,-0.602 -1.293,-0.6 -1.295,-0.598 -1.296,-0.595 -1.297,-0.593 -1.298,-0.59 -1.298,-0.588 -1.299,-0.585 -1.299,-0.583 -1.3,-0.58 -1.3,-0.578 -1.3,-0.575 -1.3,-0.425 -1.3,-0.422 -1.3,-0.42 -1.299,-0.417 -1.299,-0.415 -1.298,-0.412 -1.298,-0.41 -1.297,-0.407 -1.296,-0.405 -1.295,-0.402 -1.293,-0.4 -1.292,-0.398 -1.29,-0.396 -1.289,-0.394 -1.287,-0.392 -1.285,-0.39 -1.283,-0.388 -1.281,-0.386 -1.279,-0.385 -1.277,-0.383 -1.275,-0.382 -1.273,-0.38 -1.27,-0.379 -1.268,-0.378 -1.265,-0.377 -1.263,-0.377 -1.26,-0.376 -1.258,-0.376 -1.255,-0.375 -0.745,-0.375
  Top Layer region: 1.258,-0.376 1.26,-0.376 1.263,-0.377 1.265,-0.377 1.268,-0.378 1.27,-0.379 1.273,-0.38 1.275,-0.382 1.277,-0.383 1.279,-0.385 1.281,-0.386 1.283,-0.388 1.285,-0.39 1.287,-0.392 1.289,-0.394 1.29,-0.396 1.292,-0.398 1.293,-0.4 1.295,-0.402 1.296,-0.405 1.297,-0.407 1.298,-0.41 1.298,-0.412 1.299,-0.415 1.299,-0.417 1.3,-0.42 1.3,-0.422 1.3,-0.425 1.3,-0.575 1.3,-0.578 1.3,-0.58 1.299,-0.583 1.299,-0.585 1.298,-0.588 1.298,-0.59 1.297,-0.593 1.296,-0.595 1.295,-0.598 1.293,-0.6 1.292,-0.602 1.29,-0.604 1.289,-0.606 1.287,-0.608 1.285,-0.61 1.283,-0.612 1.281,-0.614 1.279,-0.615 1.277,-0.617 1.275,-0.618 1.273,-0.62 1.27,-0.621 1.268,-0.622 1.265,-0.623 1.263,-0.623 1.26,-0.624 1.258,-0.624 1.255,-0.625 0.745,-0.625 0.742,-0.624 0.74,-0.624 0.737,-0.623 0.735,-0.623 0.732,-0.622 0.73,-0.621 0.727,-0.62 0.725,-0.618 0.723,-0.617 0.721,-0.615 0.719,-0.614 0.717,-0.612 0.715,-0.61 0.713,-0.608 0.711,-0.606 0.71,-0.604 0.708,-0.602 0.707,-0.6 0.705,-0.598 0.704,-0.595 0.703,-0.593 0.702,-0.59 0.702,-0.588 0.701,-0.585 0.701,-0.583 0.7,-0.58 0.7,-0.578 0.7,-0.575 0.7,-0.425 0.7,-0.422 0.7,-0.42 0.701,-0.417 0.701,-0.415 0.702,-0.412 0.702,-0.41 0.703,-0.407 0.704,-0.405 0.705,-0.402 0.707,-0.4 0.708,-0.398 0.71,-0.396 0.711,-0.394 0.713,-0.392 0.715,-0.39 0.717,-0.388 0.719,-0.386 0.721,-0.385 0.723,-0.383 0.725,-0.382 0.727,-0.38 0.73,-0.379 0.732,-0.378 0.735,-0.377 0.737,-0.377 0.74,-0.376 0.742,-0.376 0.745,-0.375 1.255,-0.375
  Top Layer region: -0.742,0.124 -0.74,0.124 -0.737,0.123 -0.735,0.123 -0.732,0.122 -0.73,0.121 -0.727,0.12 -0.725,0.118 -0.723,0.117 -0.721,0.115 -0.719,0.114 -0.717,0.112 -0.715,0.11 -0.713,0.108 -0.711,0.106 -0.71,0.104 -0.708,0.102 -0.707,0.1 -0.705,0.098 -0.704,0.095 -0.703,0.093 -0.702,0.09 -0.702,0.088 -0.701,0.085 -0.701,0.083 -0.7,0.08 -0.7,0.078 -0.7,0.075 -0.7,-0.075 -0.7,-0.078 -0.7,-0.08 -0.701,-0.083 -0.701,-0.085 -0.702,-0.088 -0.702,-0.09 -0.703,-0.093 -0.704,-0.095 -0.705,-0.098 -0.707,-0.1 -0.708,-0.102 -0.71,-0.104 -0.711,-0.106 -0.713,-0.108 -0.715,-0.11 -0.717,-0.112 -0.719,-0.114 -0.721,-0.115 -0.723,-0.117 -0.725,-0.118 -0.727,-0.12 -0.73,-0.121 -0.732,-0.122 -0.735,-0.123 -0.737,-0.123 -0.74,-0.124 -0.742,-0.124 -0.745,-0.125 -1.255,-0.125 -1.258,-0.124 -1.26,-0.124 -1.263,-0.123 -1.265,-0.123 -1.268,-0.122 -1.27,-0.121 -1.273,-0.12 -1.275,-0.118 -1.277,-0.117 -1.279,-0.115 -1.281,-0.114 -1.283,-0.112 -1.285,-0.11 -1.287,-0.108 -1.289,-0.106 -1.29,-0.104 -1.292,-0.102 -1.293,-0.1 -1.295,-0.098 -1.296,-0.095 -1.297,-0.093 -1.298,-0.09 -1.298,-0.088 -1.299,-0.085 -1.299,-0.083 -1.3,-0.08 -1.3,-0.078 -1.3,-0.075 -1.3,0.075 -1.3,0.078 -1.3,0.08 -1.299,0.083 -1.299,0.085 -1.298,0.088 -1.298,0.09 -1.297,0.093 -1.296,0.095 -1.295,0.098 -1.293,0.1 -1.292,0.102 -1.29,0.104 -1.289,0.106 -1.287,0.108 -1.285,0.11 -1.283,0.112 -1.281,0.114 -1.279,0.115 -1.277,0.117 -1.275,0.118 -1.273,0.12 -1.27,0.121 -1.268,0.122 -1.265,0.123 -1.263,0.123 -1.26,0.124 -1.258,0.124 -1.255,0.125 -0.745,0.125
  Top Layer region: -0.292,0.624 -0.29,0.624 -0.287,0.623 -0.285,0.623 -0.282,0.622 -0.28,0.621 -0.277,0.62 -0.275,0.618 -0.273,0.617 -0.271,0.615 -0.269,0.614 -0.267,0.612 -0.265,0.61 -0.263,0.608 -0.261,0.606 -0.26,0.604 -0.258,0.602 -0.257,0.6 -0.255,0.598 -0.254,0.595 -0.253,0.593 -0.252,0.59 -0.252,0.588 -0.251,0.585 -0.251,0.583 -0.25,0.58 -0.25,0.578 -0.25,0.575 -0.25,0.425 -0.25,0.422 -0.25,0.42 -0.251,0.417 -0.251,0.415 -0.252,0.412 -0.252,0.41 -0.253,0.407 -0.254,0.405 -0.255,0.402 -0.257,0.4 -0.258,0.398 -0.26,0.396 -0.261,0.394 -0.263,0.392 -0.265,0.39 -0.267,0.388 -0.269,0.386 -0.271,0.385 -0.273,0.383 -0.275,0.382 -0.277,0.38 -0.28,0.379 -0.282,0.378 -0.285,0.377 -0.287,0.377 -0.29,0.376 -0.292,0.376 -0.295,0.375 -1.255,0.375 -1.258,0.376 -1.26,0.376 -1.263,0.377 -1.265,0.377 -1.268,0.378 -1.27,0.379 -1.273,0.38 -1.275,0.382 -1.277,0.383 -1.279,0.385 -1.281,0.386 -1.283,0.388 -1.285,0.39 -1.287,0.392 -1.289,0.394 -1.29,0.396 -1.292,0.398 -1.293,0.4 -1.295,0.402 -1.296,0.405 -1.297,0.407 -1.298,0.41 -1.298,0.412 -1.299,0.415 -1.299,0.417 -1.3,0.42 -1.3,0.422 -1.3,0.425 -1.3,0.575 -1.3,0.578 -1.3,0.58 -1.299,0.583 -1.299,0.585 -1.298,0.588 -1.298,0.59 -1.297,0.593 -1.296,0.595 -1.295,0.598 -1.293,0.6 -1.292,0.602 -1.29,0.604 -1.289,0.606 -1.287,0.608 -1.285,0.61 -1.283,0.612 -1.281,0.614 -1.279,0.615 -1.277,0.617 -1.275,0.618 -1.273,0.62 -1.27,0.621 -1.268,0.622 -1.265,0.623 -1.263,0.623 -1.26,0.624 -1.258,0.624 -1.255,0.625 -0.295,0.625
  Top Layer region: -0.592,1.449 -0.59,1.449 -0.587,1.448 -0.585,1.448 -0.582,1.447 -0.58,1.446 -0.577,1.445 -0.575,1.443 -0.573,1.442 -0.571,1.44 -0.569,1.439 -0.567,1.437 -0.565,1.435 -0.563,1.433 -0.561,1.431 -0.56,1.429 -0.558,1.427 -0.557,1.425 -0.555,1.423 -0.554,1.42 -0.553,1.418 -0.552,1.415 -0.552,1.413 -0.551,1.41 -0.551,1.408 -0.55,1.405 -0.55,1.403 -0.55,1.4 -0.55,0.925 -0.55,0.922 -0.55,0.92 -0.551,0.917 -0.551,0.915 -0.552,0.912 -0.552,0.91 -0.553,0.907 -0.554,0.905 -0.555,0.902 -0.557,0.9 -0.558,0.898 -0.56,0.896 -0.561,0.894 -0.563,0.892 -0.565,0.89 -0.567,0.888 -0.569,0.886 -0.571,0.885 -0.573,0.883 -0.575,0.882 -0.577,0.88 -0.58,0.879 -0.582,0.878 -0.585,0.877 -0.587,0.877 -0.59,0.876 -0.592,0.876 -0.595,0.875 -1.255,0.875 -1.258,0.876 -1.26,0.876 -1.263,0.877 -1.265,0.877 -1.268,0.878 -1.27,0.879 -1.273,0.88 -1.275,0.882 -1.277,0.883 -1.279,0.885 -1.281,0.886 -1.283,0.888 -1.285,0.89 -1.287,0.892 -1.289,0.894 -1.29,0.896 -1.292,0.898 -1.293,0.9 -1.295,0.902 -1.296,0.905 -1.297,0.907 -1.298,0.91 -1.298,0.912 -1.299,0.915 -1.299,0.917 -1.3,0.92 -1.3,0.922 -1.3,0.925 -1.3,1.05 -1.3,1.053 -1.3,1.055 -1.299,1.058 -1.299,1.06 -1.298,1.063 -1.298,1.065 -1.297,1.068 -1.296,1.07 -1.295,1.073 -1.293,1.075 -1.292,1.077 -1.29,1.079 -1.289,1.081 -1.287,1.083 -1.285,1.085 -1.283,1.087 -1.281,1.089 -1.279,1.09 -1.277,1.092 -1.275,1.093 -1.273,1.095 -1.27,1.096 -1.268,1.097 -1.265,1.098 -1.263,1.098 -1.26,1.099 -1.258,1.099 -1.255,1.1 -0.95,1.1 -0.95,1.4 -0.95,1.403 -0.95,1.405 -0.949,1.408 -0.949,1.41 -0.948,1.413 -0.948,1.415 -0.947,1.418 -0.946,1.42 -0.945,1.423 -0.943,1.425 -0.942,1.427 -0.94,1.429 -0.939,1.431 -0.937,1.433 -0.935,1.435 -0.933,1.437 -0.931,1.439 -0.929,1.44 -0.927,1.442 -0.925,1.443 -0.923,1.445 -0.92,1.446 -0.918,1.447 -0.915,1.448 -0.913,1.448 -0.91,1.449 -0.908,1.449 -0.905,1.45 -0.595,1.45
  silkscreen extent -2.15,0.9 -1.95,1.1, body extent -1.1,-1.25 1.1,1.25, height 1.01
KEYSTONE_5277 [mm]
  round 2.4 hole 1.6: 1(0,0)
  silkscreen extent -1.59,-1.59 1.59,1.59, body extent -1.58,-1.65 1.58,1.52, height 3.17
QFN50P700X700X80-49N [mm]
  rect 0.85x0.3 smd: 1(-3.45,2.75) 2(-3.45,2.25) 3(-3.45,1.75) 4(-3.45,1.25) 5(-3.45,0.75) 6(-3.45,0.25) 7(-3.45,-0.25) 8(-3.45,-0.75) 9(-3.45,-1.25) 10(-3.45,-1.75) 11(-3.45,-2.25) 12(-3.45,-2.75) 25(3.45,-2.75) 26(3.45,-2.25) 27(3.45,-1.75) 28(3.45,-1.25) 29(3.45,-0.75) 30(3.45,-0.25) 31(3.45,0.25) 32(3.45,0.75) 33(3.45,1.25) 34(3.45,1.75) 35(3.45,2.25) 36(3.45,2.75)
  rect 0.3x0.85 smd: 13(-2.75,-3.45) 14(-2.25,-3.45) 15(-1.75,-3.45) 16(-1.25,-3.45) 17(-0.75,-3.45) 18(-0.25,-3.45) 19(0.25,-3.45) 20(0.75,-3.45) 21(1.25,-3.45) 22(1.75,-3.45) 23(2.25,-3.45) 24(2.75,-3.45) 37(2.75,3.45) 38(2.25,3.45) 39(1.75,3.45) 40(1.25,3.45) 41(0.75,3.45) 42(0.25,3.45) 43(-0.25,3.45) 44(-0.75,3.45) 45(-1.25,3.45) 46(-1.75,3.45) 47(-2.25,3.45) 48(-2.75,3.45)
  rect 5.6x5.6 smd: 49(0,0)
  silkscreen extent -4,3.38 -3.75,3.62, body extent -3.5,-3.5 3.5,3.5, height 0.8
RESC2012X50N [mm]
  rect 0.92x1.42 smd paste+0 mask+0.102: 1(-1,0) 2(1,0)
  silkscreen extent -0.22,-0.7 0.22,0.7, body extent -1,-0.63 1,0.63, height 0.5
RESC2012X55N [mm]
  rect 0.89x1.42 smd: 1(-0.97,0) 2(0.97,0)
  silkscreen extent -0.21,-0.7 0.21,0.7, body extent -1,-0.63 1,0.63, height 0.55
RESC2012X60N [mm]
  rect 0.92x1.38 smd: 1(-0.955,0) 2(0.955,0)
  silkscreen extent -0.17,-0.68 0.17,0.68, body extent -1,-0.63 1,0.63, height 0.6
RHD2216 [mm] "QFN, 56-Leads, Body 8.00x8.00mm, Pitch 0.50mm, Thermal Pad 6.10x6.10mm, IPC Medium Density"
  oval 0.75x0.2 smd: 1(-3.95,3.25) 2(-3.95,2.75) 3(-3.95,2.25) 4(-3.95,1.75) 5(-3.95,1.25) 6(-3.95,0.75) 7(-3.95,0.25) 8(-3.95,-0.25) 9(-3.95,-0.75) 10(-3.95,-1.25) 11(-3.95,-1.75) 12(-3.95,-2.25) 13(-3.95,-2.75) 14(-3.95,-3.25) 29(3.95,-3.25) 30(3.95,-2.75) 31(3.95,-2.25) 32(3.95,-1.75) 33(3.95,-1.25) 34(3.95,-0.75) 35(3.95,-0.25) 36(3.95,0.25) 37(3.95,0.75) 38(3.95,1.25) 39(3.95,1.75) 40(3.95,2.25) 41(3.95,2.75) 42(3.95,3.25)
  oval 0.2x0.75 smd: 15(-3.25,-3.95) 16(-2.75,-3.95) 17(-2.25,-3.95) 18(-1.75,-3.95) 19(-1.25,-3.95) 20(-0.75,-3.95) 21(-0.25,-3.95) 22(0.25,-3.95) 23(0.75,-3.95) 24(1.25,-3.95) 25(1.75,-3.95) 26(2.25,-3.95) 27(2.75,-3.95) 28(3.25,-3.95) 43(3.25,3.95) 44(2.75,3.95) 45(2.25,3.95) 46(1.75,3.95) 47(1.25,3.95) 48(0.75,3.95) 49(0.25,3.95) 50(-0.25,3.95) 51(-0.75,3.95) 52(-1.25,3.95) 53(-1.75,3.95) 54(-2.25,3.95) 55(-2.75,3.95) 56(-3.25,3.95)
  rect 6.1x6.1 smd: 57(0,0)
  silkscreen extent -4.65,-4.06 4.06,4.06, body extent -4.02,-4.02 4.02,4.02, height 0.8
SAMTEC_SSW-135-02-G-D [mm]
  rect 1.39x1.39 hole 1.04: 01(0,0)
  round 1.39 hole 1.04: 02(0,2.54) 03(-2.54,0) 04(-2.54,2.54) 05(-5.08,0) 06(-5.08,2.54) 07(-7.62,0) 08(-7.62,2.54) 09(-10.16,0) 10(-10.16,2.54) 11(-12.7,0) 12(-12.7,2.54) 13(-15.24,0) 14(-15.24,2.54) 15(-17.78,0) 16(-17.78,2.54) 17(-20.32,0) 18(-20.32,2.54) 19(-22.86,0) 20(-22.86,2.54) 21(-25.4,0) 22(-25.4,2.54) 23(-27.94,0) 24(-27.94,2.54) 25(-30.48,0) 26(-30.48,2.54) 27(-33.02,0) 28(-33.02,2.54) 29(-35.56,0) 30(-35.56,2.54) 31(-38.1,0) 32(-38.1,2.54) 33(-40.64,0) 34(-40.64,2.54) 35(-43.18,0) 36(-43.18,2.54) 37(-45.72,0) 38(-45.72,2.54) 39(-48.26,0) 40(-48.26,2.54) 41(-50.8,0) 42(-50.8,2.54) 43(-53.34,0) 44(-53.34,2.54) 45(-55.88,0) 46(-55.88,2.54) 47(-58.42,0) 48(-58.42,2.54) 49(-60.96,0) 50(-60.96,2.54) 51(-63.5,0) 52(-63.5,2.54) 53(-66.04,0) 54(-66.04,2.54) 55(-68.58,0) 56(-68.58,2.54) 57(-71.12,0) 58(-71.12,2.54) 59(-73.66,0) 60(-73.66,2.54) 61(-76.2,0) 62(-76.2,2.54) 63(-78.74,0) 64(-78.74,2.54) 65(-81.28,0) 66(-81.28,2.54) 67(-83.82,0) 68(-83.82,2.54) 69(-86.36,0) 70(-86.36,2.54)
  silkscreen extent -87.89,-1.21 2.27,3.75, body extent -87.88,-1.27 1.52,3.68, height 8.52
SAMTEC_ZF5S-25-01-T-WT-K-TR [mm]
  rect 0.3x1.6 smd: 01(-6,1.98) 02(-5.5,1.98) 03(-5,1.98) 04(-4.5,1.98) 05(-4,1.98) 06(-3.5,1.98) 07(-3,1.98) 08(-2.5,1.98) 09(-2,1.98) 10(-1.5,1.98) 11(-1,1.98) 12(-0.5,1.98) 13(0,1.98) 14(0.5,1.98) 15(1,1.98) 16(1.5,1.98) 17(2,1.98) 18(2.5,1.98) 19(3,1.98) 20(3.5,1.98) 21(4,1.98) 22(4.5,1.98) 23(5,1.98) 24(5.5,1.98) 25(6,1.98)
  rect 2.24x3.12 smd: S1(-7.647,0) S2(7.647,0)
  silkscreen extent -9.12,-3.25 9.12,3.64, body extent -9.08,-3.05 9.08,2.62, height 2.16
SOIC127P594X363-8N [mm]
  rect 1.45x0.7 smd: 1(-2.725,1.905) 2(-2.725,0.635) 3(-2.725,-0.635) 4(-2.725,-1.905) 5(2.725,-1.905) 6(2.725,-0.635) 7(2.725,0.635) 8(2.725,1.905)
  silkscreen extent -3.45,-2.44 1.65,2.61, body extent -2.84,-2.44 3.1,2.44, height 3.61
SOT95P280X145-5N [mm]
  rrect50% 1.21x0.59 smd paste+0 mask+0.102: 1(-1.255,0.95) 2(-1.255,0) 3(-1.255,-0.95) 4(1.255,-0.95) 5(1.255,0.95)
  silkscreen extent -2.51,-1.45 0.8,1.45, body extent -1.4,-1.45 1.4,1.45, height 1.45
SOT95P280X145-6N [mm]
  rect 1.2x0.6 smd: 1(-1.25,0.95) 2(-1.25,0) 3(-1.25,-0.95) 4(1.25,-0.95) 5(1.25,0) 6(1.25,0.95)
  silkscreen extent -1.85,-1.45 0.3,1.6, body extent -1.4,-1.45 1.4,1.45, height 1.2
SOT-23 [mm] "SOT23, 3-Leads, IPC Medium Density, TO-236"
  rrect25% 1x0.65 smd: 1(-1.2,1.02) 2(-1.2,-1.02) 3(1.2,0)
  silkscreen extent -1.65,-1.65 0.85,1.65, body extent -1.3,-1.52 1.3,1.52, height 1.3
TE_2466267-1 [mm]
  round 1.88 hole 1.25: 1(0,0)
  round 3.29 hole 2.19: 2(-3.3,3.3) 3(3.3,3.3) 4(-3.3,-3.3) 5(3.3,-3.3)
  silkscreen extent -5.31,-5.3 5.31,5.31, body extent -5.25,-22.9 5.25,5.25, height 11.83
WRME-FIMM_1769205132 [mm]
  rect 0.8x2.3 smd paste+0 mask+0.102: 1(-3.81,-3.15) 2(-2.54,-3.15) 3(2.54,-3.15) 4(3.81,-3.15) 5(3.81,3.15) 6(-2.54,3.15) 7(-3.81,3.15)
  silkscreen extent -4.6,-3.6 4.6,3.6, body extent -4.5,-3.5 4.5,3.5, height 3.1

## Part data
B1 B2: library part CMP-047-000000-2, "DIN-EN/IEC60747-5-5, 565 V Peak Working Insulation Voltage; Safety and Regulatory Approvals:; UL1577, 2,500 VACRMS for 1 Minute; Available in Single-channel 8-pin SOIC (FOD050L) or Dual-channel 8-pin SOIC (FOD053L);", Manufacturer_Name=onsemi, Mouser Part Number=512-FOD050L, Arrow Part Number=FOD050L, Arrow Price/Stock=https://www.arrow.com/en/products/fod050l/on-semiconductor?region=nac, Datasheet Link=https://www.onsemi.com/pub/Collateral/FOD053L-D.PDF, Design Item ID=FOD050L, Geometry.Height=3.63mm, Manufacturer_Part_Number=FOD050L, Mouser Price/Stock=https://www.mouser.co.uk/ProductDetail/onsemi-Fairchild/FOD050L?qs=ReZUMDdiXnRPjBKyX9bkKw%3D%3D, Source=FOD050L.SchLib
B3 B4: library part CMP-011-00015-2, "1 Ohm SPDT Analog Switch 5-V/3.3-V Single Channel 2:1 Multiplexer/Demultiplexer", Manufacturer_Name="Texas Instruments", Datasheet Link=http://www.ti.com/lit/gpn/ts5a3159a, Design Item ID=TS5A3159ADBVR, Geometry.Height=1.45mm, Manufacturer_Part_Number=TS5A3159ADBVR, Source=TS5A3159ADBVR.SchLib
B5 B6: library part CMP-011-00013-2, "MAXIM INTEGRATED PRODUCTS - MAX14866UTM+ - ANALOGUE SWITCH, 16 CH, SPST, TQFN-16", Manufacturer_Name="Analog Devices", Mouser Part Number=700-MAX14866UTM+, Arrow Part Number=MAX14866UTM+, Arrow Price/Stock=https://www.arrow.com/en/products/max14866utm/analog-devices?utm_currency=USD&region=nac, Datasheet Link=https://www.mouser.com/datasheet/2/256/MAX14866-1154497.pdf, Design Item ID=MAX14866UTM+, Geometry.Height=0.8mm, Manufacturer_Part_Number=MAX14866UTM+, Mouser Price/Stock=https://www.mouser.co.uk/ProductDetail/Analog-Devices-Maxim-Integrated/MAX14866UTM%2b?qs=1mbolxNpo8f6nC88ZZmOdg%3D%3D, Source=MAX14866UTM+.SchLib
C1 C2 C7 C8: library part CMP-001-00085-1, "10 ÂµF Â±10% 50V Ceramic Capacitor X5R 1210 (3225 Metric)", Case/Package="3225 KEMET", Check_prices=https://www.snapeda.com/parts/C1210C106K5PACTU/KEMET/view-part/?ref=eda, Component Type=Standard, Design Item ID=C1210C106K5PACTU, MF=KEMET, MP=C1210C106K5PACTU, Pins=2, SnapEDA_Link=https://www.snapeda.com/parts/C1210C106K5PACTU/KEMET/view-part/?ref=snap, Source=C1210C106K5PACTU.SchLib
C3 C6: library part CMP-001-00086-1, "47 ÂµF Â±10% 10V Ceramic Capacitor X7R 1210 (3225 Metric)", Case/Package="SMD-2 Samsung", Check_prices=https://www.snapeda.com/parts/CL32B476KPJNNWE/Samsung/view-part/?ref=eda, Component Type=Standard, Design Item ID=CL32B476KPJNNWE, MF=Samsung, MP=CL32B476KPJNNWE, Pins=2, SnapEDA_Link=https://www.snapeda.com/parts/CL32B476KPJNNWE/Samsung/view-part/?ref=snap, Source=CL32B476KPJNNWE.SchLib
C4 C9 C11 C12 C14 C15 C16 C17: library part CMP-001-00084-1, "0.1 ÂµF Â±10% 35V Ceramic Capacitor X7R 0805 (2012 Metric)", Case/Package="805-2 KEMET", Check_prices=https://www.snapeda.com/parts/C0805C104K6RACTU/KEMET/view-part/?ref=eda, Component Type=Standard, Design Item ID=C0805C104K6RACTU, MF=KEMET, MP=C0805C104K6RACTU, Pins=2, SnapEDA_Link=https://www.snapeda.com/parts/C0805C104K6RACTU/KEMET/view-part/?ref=snap, Source=C0805C104K6RACTU.SchLib
C5 C10: library part CMP-001-00083-1, "Capacitor;Ceramic;Cap 0.01uF;Tol 5%;Vol-Rtg 50 V;SMT;Case 0805;X7R;TR", Case/Package="805-2 KEMET", Check_prices=https://www.snapeda.com/parts/C0805C103J5RACTU/KEMET/view-part/?ref=eda, Component Type=Standard, Design Item ID=C0805C103J5RACTU, MF=KEMET, MP=C0805C103J5RACTU, Pins=2, SnapEDA_Link=https://www.snapeda.com/parts/C0805C103J5RACTU/KEMET/view-part/?ref=snap, Source=C0805C103J5RACTU.SchLib
C13: library part CMP-001-00089-2, "1 F Film Capacitor 40V 63V Polyester, Polyethylene Naphthalate (PEN), Metallized - Stacked 2824 (7260 Metric)", Manufacturer_Name="Kyocera AVX", Datasheet Link=https://datasheets.kyocera-avx.com/cb-pen.pdf, Design Item ID=CB057D0105JBC, Geometry.Height=4.7mm, Manufacturer_Part_Number=CB057D0105JBC, Source=CB057D0105JBC.SchLib
CN1 CN2: library part CMP-066-000000-6, "70-pin connector", Package=None, Availability=Unavailable, Component Type=Standard, Design Item ID=SSW-135-02-G-D, MF=Samtec, MP=SSW-135-02-G-D, Pin Count=70, Price=None, Source=SSW-135-02-G-D.SchLib
D1: library part CMP-004-00032-1, "A 5.0V, 400W, bi-directional, SMA pkg TVS Diode", Case/Package="DO-214 Bourns", Check_prices=https://www.snapeda.com/parts/SMAJ5.0CA/Bourns/view-part/?ref=eda, Component Type=Standard, Design Item ID=SMAJ5.0CA, MF=Bourns, MP=SMAJ5.0CA, Pins=2, SnapEDA_Link=https://www.snapeda.com/parts/SMAJ5.0CA/Bourns/view-part/?ref=snap, Source=SMAJ5.0CA.SchLib
D2: library part CMP-004-00037-1, Component Type=Standard, Datasheet=https://diotec.com/request/datasheet/bat54.pdf, Design Item ID=BAT54S, ki_description="Dual Schottky Diode in Series", ki_keywords="Dual Schottky Diode Series", Pins=3, Reference=D, Source=BAT54S.SchLib
E1: library part CMP-006-00023-2, "600 Ohms @ 100 MHz 1 Power Line Ferrite Bead 0805 (2012 Metric) 1.5A 250mOhm", Case/Package=None, Check_prices=https://www.snapeda.com/parts/2-2176744-2/TE/view-part/?ref=eda, Component Type=Standard, Design Item ID=2-2176744-2, MF="TE Connectivity Passive Product", MP=2-2176744-2, Pins=2, SnapEDA_Link=https://www.snapeda.com/parts/2-2176744-2/TE/view-part/?ref=snap, Source=2-2176744-2.SchLib
F1: library part CMP-005-00013-1, "Polymeric PTC Resettable Fuse 40V 500 mA Ih Surface Mount 1812 (4532 Metric), Concave", Case/Package="1812 Bourns", Availability="Not in stock", Check_prices=https://www.snapeda.com/parts/MF-MSMF050/Bourns/view-part/?ref=eda, Component Type=Standard, Design Item ID=MF-MSMF050, MF=Bourns, MP=MF-MSMF050, Pins=2, Price=None, SnapEDA_Link=https://www.snapeda.com/parts/MF-MSMF050/Bourns/view-part/?ref=snap, Source=MF-MSMF050.SchLib
J1 J2 J3: library part CMP-019-000000-2, "BNC connector", Package=None, Availability=Unavailable, Component Type=Standard, Design Item ID=2466267-1, MP=2466267-1, Pin Count=5, Price=None, Source=2466267-1.SchLib
J4: library part CMP-084-000000-2, "25 Conductor ZIF connector", Package=None, Availability=Unavailable, Component Type=Standard, Design Item ID=ZF5S-25-01-T-WT-K-TR, MP=ZF5S-25-01-T-WT-K-TR, Pin Count=25, Price=None, Source=ZF5S-25-01-T-WT-K-TR.SchLib
R1: library part CMP-009-00177-1, "Res Thick Film 0805 11.8K Ohm 1% 0.125W(1/8W) Â±100ppm/C Molded SMD Automotive Paper T/R", Case/Package="2012 Vishay", Check_prices=https://www.snapeda.com/parts/CRCW080511K8FKEC/Vishay/view-part/?ref=eda, Component Type=Standard, Design Item ID=CRCW080511K8FKEC, MF=Vishay, MP=CRCW080511K8FKEC, Pins=2, SnapEDA_Link=https://www.snapeda.com/parts/CRCW080511K8FKEC/Vishay/view-part/?ref=snap, Source=CRCW080511K8FKEC.SchLib
R2: library part CMP-009-00178-1, "Resistor;Thick Film;3.74 Kilohms;0.125 W;1%;SMT;0805;TCR 37 ppm/DegC;TR", Case/Package="2012 Vishay", Check_prices=https://www.snapeda.com/parts/CRCW08053K74FKEA/Vishay+Dale/view-part/?ref=eda, Component Type=Standard, Design Item ID=CRCW08053K74FKEA, MF="Vishay Dale", MP=CRCW08053K74FKEA, Pins=2, SnapEDA_Link=https://www.snapeda.com/parts/CRCW08053K74FKEA/Vishay+Dale/view-part/?ref=snap, Source=CRCW08053K74FKEA.SchLib
R3 R4 R5: library part CMP-009-00180-1, "10 MOhms Â±1% 0.125W, 1/8W Chip Resistor 0805 (2012 Metric) Moisture Resistant Thick Film", Case/Package="2012 Yageo", Check_prices=https://www.snapeda.com/parts/RC0805FR-0710ML/Yageo/view-part/?ref=eda, Component Type=Standard, Design Item ID=RC0805FR-0710ML, MF=Yageo, MP=RC0805FR-0710ML, Pins=2, SnapEDA_Link=https://www.snapeda.com/parts/RC0805FR-0710ML/Yageo/view-part/?ref=snap, Source=RC0805FR-0710ML.SchLib
R6: library part CMP-009-00181-1, "Res Thin Film 0805 100 Ohm 1% 0.125W(1/8W) ?50ppm/C Molded SMD Automotive Medical Paper T/R", Case/Package="2012 Vishay", Check_prices=https://www.snapeda.com/parts/MCU08050C1000FP500/Vishay/view-part/?ref=eda, Component Type=Standard, Design Item ID=MCU08050C1000FP500, MF="Vishay Beyschlag", MP=MCU08050C1000FP500, Pins=2, SnapEDA_Link=https://www.snapeda.com/parts/MCU08050C1000FP500/Vishay/view-part/?ref=snap, Source=MCU08050C1000FP500.SchLib
TP1 TP2 TP3 TP4 TP5 TP6 TP7: library part CMP-080-000000-2, "TEST POINT (BLUE) - COMPACT", Package=None, Check_prices=https://www.snapeda.com/parts/5277/Keystone/view-part/?ref=eda, Component Type=Standard, Design Item ID=5277, MF="Keystone Electronics", MP=5277, Pin Count=1, SnapEDA_Link=https://www.snapeda.com/parts/5277/Keystone/view-part/?ref=snap, Source=5277.SchLib
U1: library part CMP-031-000000-2, "LDO", Package=None, Availability=Unavailable, Component Type=Standard, Design Item ID=TPS7A5201RPSR, MF="{'manufacturer': u'Texas Instruments'}", MP=TPS7A5201RPSR, Pin Count=12, Price=None, Source=TPS7A5201RPSR.SchLib
U2 U3: library part CMP-069-000000-2, "LGA-7 / 5Vin / 5Vout / 1W / 3kV / 9 x 7 x 3.1mm / short circuit protection", Package=None, Check_prices=https://www.snapeda.com/parts/1769205132/Wurth+Electronics/view-part/?ref=eda, Component Type=Standard, Design Item ID=WRME-FIMM_1769205132, MF="Wurth Elektronik", MP=1769205132, Pin Count=7, SnapEDA_Link=https://www.snapeda.com/parts/1769205132/Wurth+Electronics/view-part/?ref=snap, Source=WRME-FIMM_1769205132.SchLib
U4: library part CMP-014-00002-1, "Automotive 2.2V, 50MHz, Low-Noise, Single-Supply Rail-to-Rail Operational Amplifier", Case/Package="SOT-23-5 Texas Instruments", Check_prices=https://www.snapeda.com/parts/OPA365AQDBVRQ1/Texas+Instruments/view-part/?ref=eda, Component Type=Standard, Design Item ID=OPA365AQDBVRQ1, MF="Texas Instruments", MP=OPA365AQDBVRQ1, Pins=5, SnapEDA_Link=https://www.snapeda.com/parts/OPA365AQDBVRQ1/Texas+Instruments/view-part/?ref=snap, Source=OPA365AQDBVRQ1.SchLib

## Via types
v1: diameter 0.6, hole 0.3, Top Layer to Bottom Layer, 618 vias
v2: diameter 1.27, hole 0.711, Top Layer to Bottom Layer, 29 vias
v3: diameter 0.9, hole 0.508, Top Layer to Bottom Layer, 22 vias

## Nets (pads, with @x,y where several pads share a name; then routed paths per layer and width w, separated by ;. In a path a pad name is that pad's centre, name@x,y a point inside that pad or via, vN(x,y) a via of type N, cw(c..) or ccw(c..) an arc to the next point about the centre after c; other vN are vias at no path point)
5V: CN1.18 F1.1 TP1.1 | length 9.3
  Top Layer w0.254: F1.1@7.061,-20.312 F1.1@7.069,-20.32
  Top Layer w0.762: CN1.18@2.54,-20.32 F1.1@7.069,-20.32 F1.1@7.091,-20.299 ; F1.1@7.061,-20.312 TP1.1@7.061,-15.621
CH0: B5.16 IC1.9 | length 48.1
  Top Layer w0.203: B5.16@20.34,-70.785 20.368,-70.813 20.368,-72.464 v1(20.422,-72.517) ; IC1.9@36.982,-48.537 36.983,-48.536 37.578,-48.536 37.633,-48.48 38.454,-48.48 v1(38.502,-48.432)
  Bottom Layer w0.203: v1(20.422,-72.517) 22.454,-74.549 27.711,-74.549 43.713,-58.547 43.713,-50.724 41.443,-48.453 38.524,-48.453 v1(38.502,-48.432)
CH1: B5.18 IC1.8 | length 44.6
  Top Layer w0.203: v1(21.315,-71.649) 21.328,-71.636 21.328,-70.798 B5.18@21.34,-70.785 ; IC1.8@36.982,-49.037 36.983,-49.035 37.825,-49.035 v1(37.852,-49.009)
  Bottom Layer w0.203: v1(21.315,-71.649) 21.315,-72.482 22.62,-73.787 27.229,-73.787 43.104,-57.912 43.104,-50.927 41.137,-48.96 37.9,-48.96 v1(37.852,-49.009)
CH2: B5.19 IC1.7 | length 41.1
  Top Layer w0.203: B5.19@21.84,-70.785 21.869,-70.814 21.869,-72.238 v1(21.844,-72.263) ; IC1.7@36.982,-49.537 38.433,-49.537 v1(38.481,-49.489)
  Bottom Layer w0.203: v1(21.844,-72.263) 21.844,-72.297 22.42,-72.873 26.899,-72.873 42.367,-57.404 42.367,-51.003 40.874,-49.51 38.502,-49.51 v1(38.481,-49.489)
CH3: B5.21 IC1.6 | length 37.3
  Top Layer w0.203: B5.21@22.84,-70.785 22.853,-70.798 22.853,-71.712 v1(22.865,-71.725) ; IC1.6@36.982,-50.037 IC1.6@36.982,-50.037 37.743,-50.039 v1(37.77,-50.066)
  Bottom Layer w0.203: v1(22.865,-71.725) 23.519,-72.379 25.995,-72.379 41.681,-56.693 41.681,-51.029 40.67,-50.017 37.818,-50.017 v1(37.77,-50.066)
CH4: B5.23 IC1.5 | length 33.5
  Top Layer w0.203: B5.23@23.84,-70.785 23.888,-70.834 23.888,-71.392 v1(24.346,-71.85) ; IC1.5@36.982,-50.537 37.494,-50.537 37.551,-50.594 38.416,-50.594 v1(38.464,-50.546)
  Bottom Layer w0.203: v1(24.346,-71.85) 24.366,-71.831 25.222,-71.831 40.919,-56.134 40.919,-51.232 40.225,-50.537 38.473,-50.537 v1(38.464,-50.546)
CH5: B5.25 IC1.4 | length 28.9
  Top Layer w0.203: B5.25@25.04,-70.085 25.075,-70.12 25.848,-70.12 v1(25.883,-70.155) ; IC1.4@36.982,-51.037 37.253,-51.037 37.339,-51.123 v1(37.819,-51.123)
  Bottom Layer w0.203: v1(25.883,-70.155) 25.883,-70.06 40.234,-55.709 40.234,-51.587 39.721,-51.075 37.868,-51.075 v1(37.819,-51.123)
CH6: B5.29 IC1.3 | length 25.6
  Top Layer w0.203: B5.29@25.04,-68.085 25.071,-68.117 25.877,-68.117 v1(25.908,-68.148) ; IC1.3@37.255,-51.539 37.368,-51.652 38.453,-51.652 v1(38.502,-51.603)
  Bottom Layer w0.203: v1(25.908,-68.148) 25.971,-68.085 26.606,-68.085 39.497,-55.194 39.497,-51.892 39.187,-51.583 38.522,-51.583 v1(38.502,-51.603)
CH7: B5.31 IC1.2 | length 23.4
  Top Layer w0.203: B5.31@25.04,-67.085 25.051,-67.096 26.532,-67.096 v1(26.543,-67.107) ; IC1.2@36.982,-52.037 36.983,-52.039 37.553,-52.039 37.695,-52.18 v1(37.802,-52.18)
  Bottom Layer w0.203: v1(26.543,-67.107) 38.964,-54.686 38.964,-52.553 38.591,-52.18 v1(37.802,-52.18)
CH8: B5.33 IC1.1 | length 20.7
  Top Layer w0.203: B5.33@25.04,-66.085 25.082,-66.043 25.853,-66.043 v1(25.895,-66.001) ; IC1.1@37.255,-52.539 37.548,-52.832 v1(38.202,-52.832)
  Bottom Layer w0.203: v1(25.895,-66.001) 25.903,-65.993 26.514,-65.993 38.379,-54.127 38.379,-53.622 38.202,-53.444 v1(38.202,-52.832)
CH9: B6.2 IC1.56 | length 18.6
  Top Layer w0.203: IC1.56@36.282,-53.237 36.282,-56.652 v1(42.062,-62.433) ; v1(43.907,-67.794) 44.015,-67.794 44.128,-67.907 44.667,-67.907 B6.2@44.716,-67.956
  Bottom Layer w0.203: v1(42.062,-62.433) 43.922,-64.292 43.922,-67.779 v1(43.907,-67.794)
CH10: B6.4 IC1.55 | length 19.8
  Top Layer w0.203: IC1.55@35.782,-53.237 35.782,-57.197 v1(41.544,-62.96) ; v1(43.983,-68.902) 44.01,-68.929 44.689,-68.929 B6.4@44.716,-68.956
  Bottom Layer w0.203: v1@41.637,-62.998 43.332,-64.694 43.332,-68.295 43.939,-68.902 v1(43.983,-68.902)
CH11: B6.6 IC1.54 | length 21.5
  Top Layer w0.203: IC1.54@35.282,-53.237 35.282,-57.742 v1@41.178,-63.639 ; v1(43.534,-69.964) 43.538,-69.96 44.711,-69.96 B6.6@44.716,-69.956
  Bottom Layer w0.203: v1(41.026,-63.486) 42.774,-65.234 42.774,-69.204 v1(43.534,-69.964)
CH12: B6.8 IC1.53 | length 22.4
  Top Layer w0.203: IC1.53@34.782,-53.237 34.782,-58.287 v1(40.508,-64.013) ; v1(43.959,-71.036) 44,-70.996 44.675,-70.996 B6.8@44.716,-70.956
  Bottom Layer w0.203: v1(40.508,-64.013) 42.096,-65.601 42.096,-69.274 43.858,-71.036 v1(43.959,-71.036)
CH13: B6.12 IC1.52 | length 24.5
  Top Layer w0.203: IC1.52@34.282,-53.237 34.282,-58.832 v1(39.99,-64.54) ; v1(43.993,-72.983) 44.006,-72.969 44.702,-72.969 B6.12@44.716,-72.956
  Bottom Layer w0.203: v1@40,-64.55 41.453,-66.004 41.453,-70.416 43.993,-72.956 v1(43.993,-72.983)
CH14: B6.14 IC1.51 | length 27.8
  Top Layer w0.203: IC1.51@33.782,-53.237 33.782,-59.396 v1@39.46,-65.075 ; v1(45.835,-74.524) 45.875,-74.483 45.875,-73.696 B6.14@45.916,-73.656
  Bottom Layer w0.203: v1(39.463,-65.075) 40.775,-66.386 40.775,-70.512 44.786,-74.524 v1(45.835,-74.524)
CH15: B6.16 IC1.50 | length 30
  Top Layer w0.203: IC1.50@33.282,-53.237 33.282,-59.921 v1(38.953,-65.593) ; v1(46.892,-74.524) 46.904,-74.512 46.904,-73.667 B6.16@46.916,-73.656